# Altium PCB Arm.PcbDoc (part 1 of 2)
Units mil, origin at the board's own origin, x right, y up, seen from the top; angles counter-clockwise.
Board outline 3959.08 x 4177.68 mil, 4 copper layers (Top Layer, Ground, Power, Bottom Layer), stack 58.661 mil thick; 200 components, 119 nets, 620 pads, 0 vias.
Unrouted connection lines stored in the file: 405.
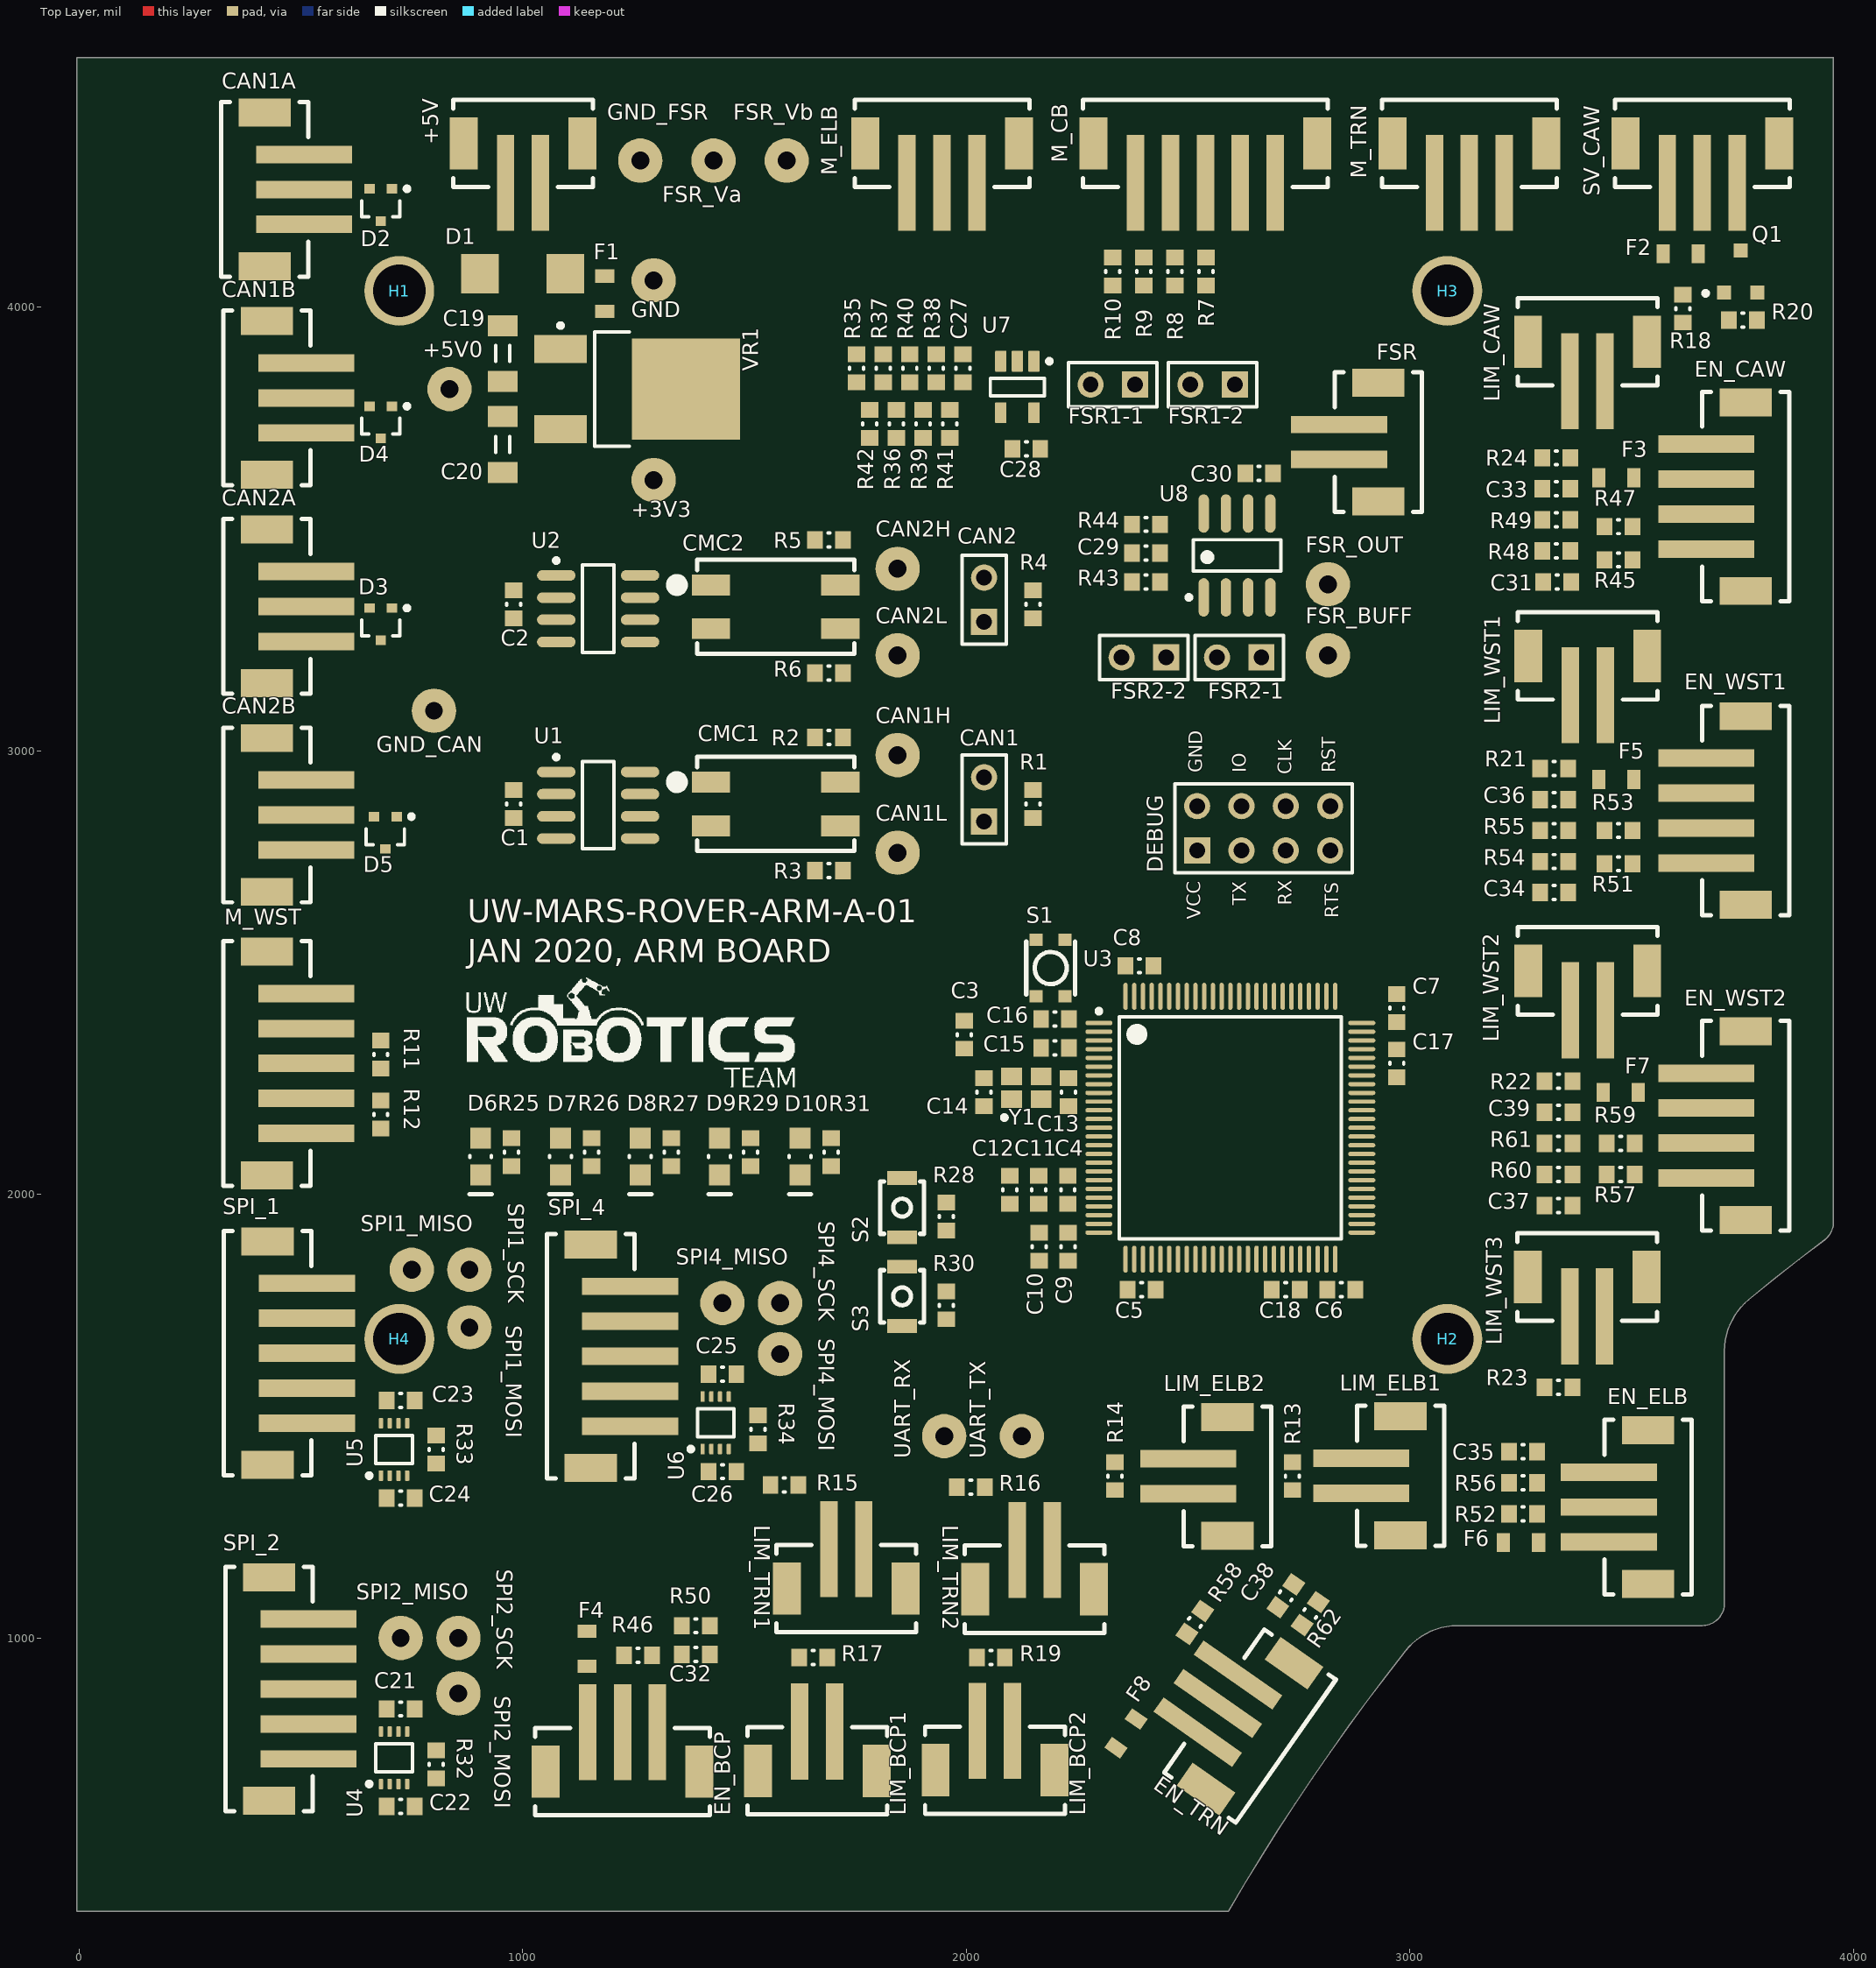
[diagram p0: Top Layer view]
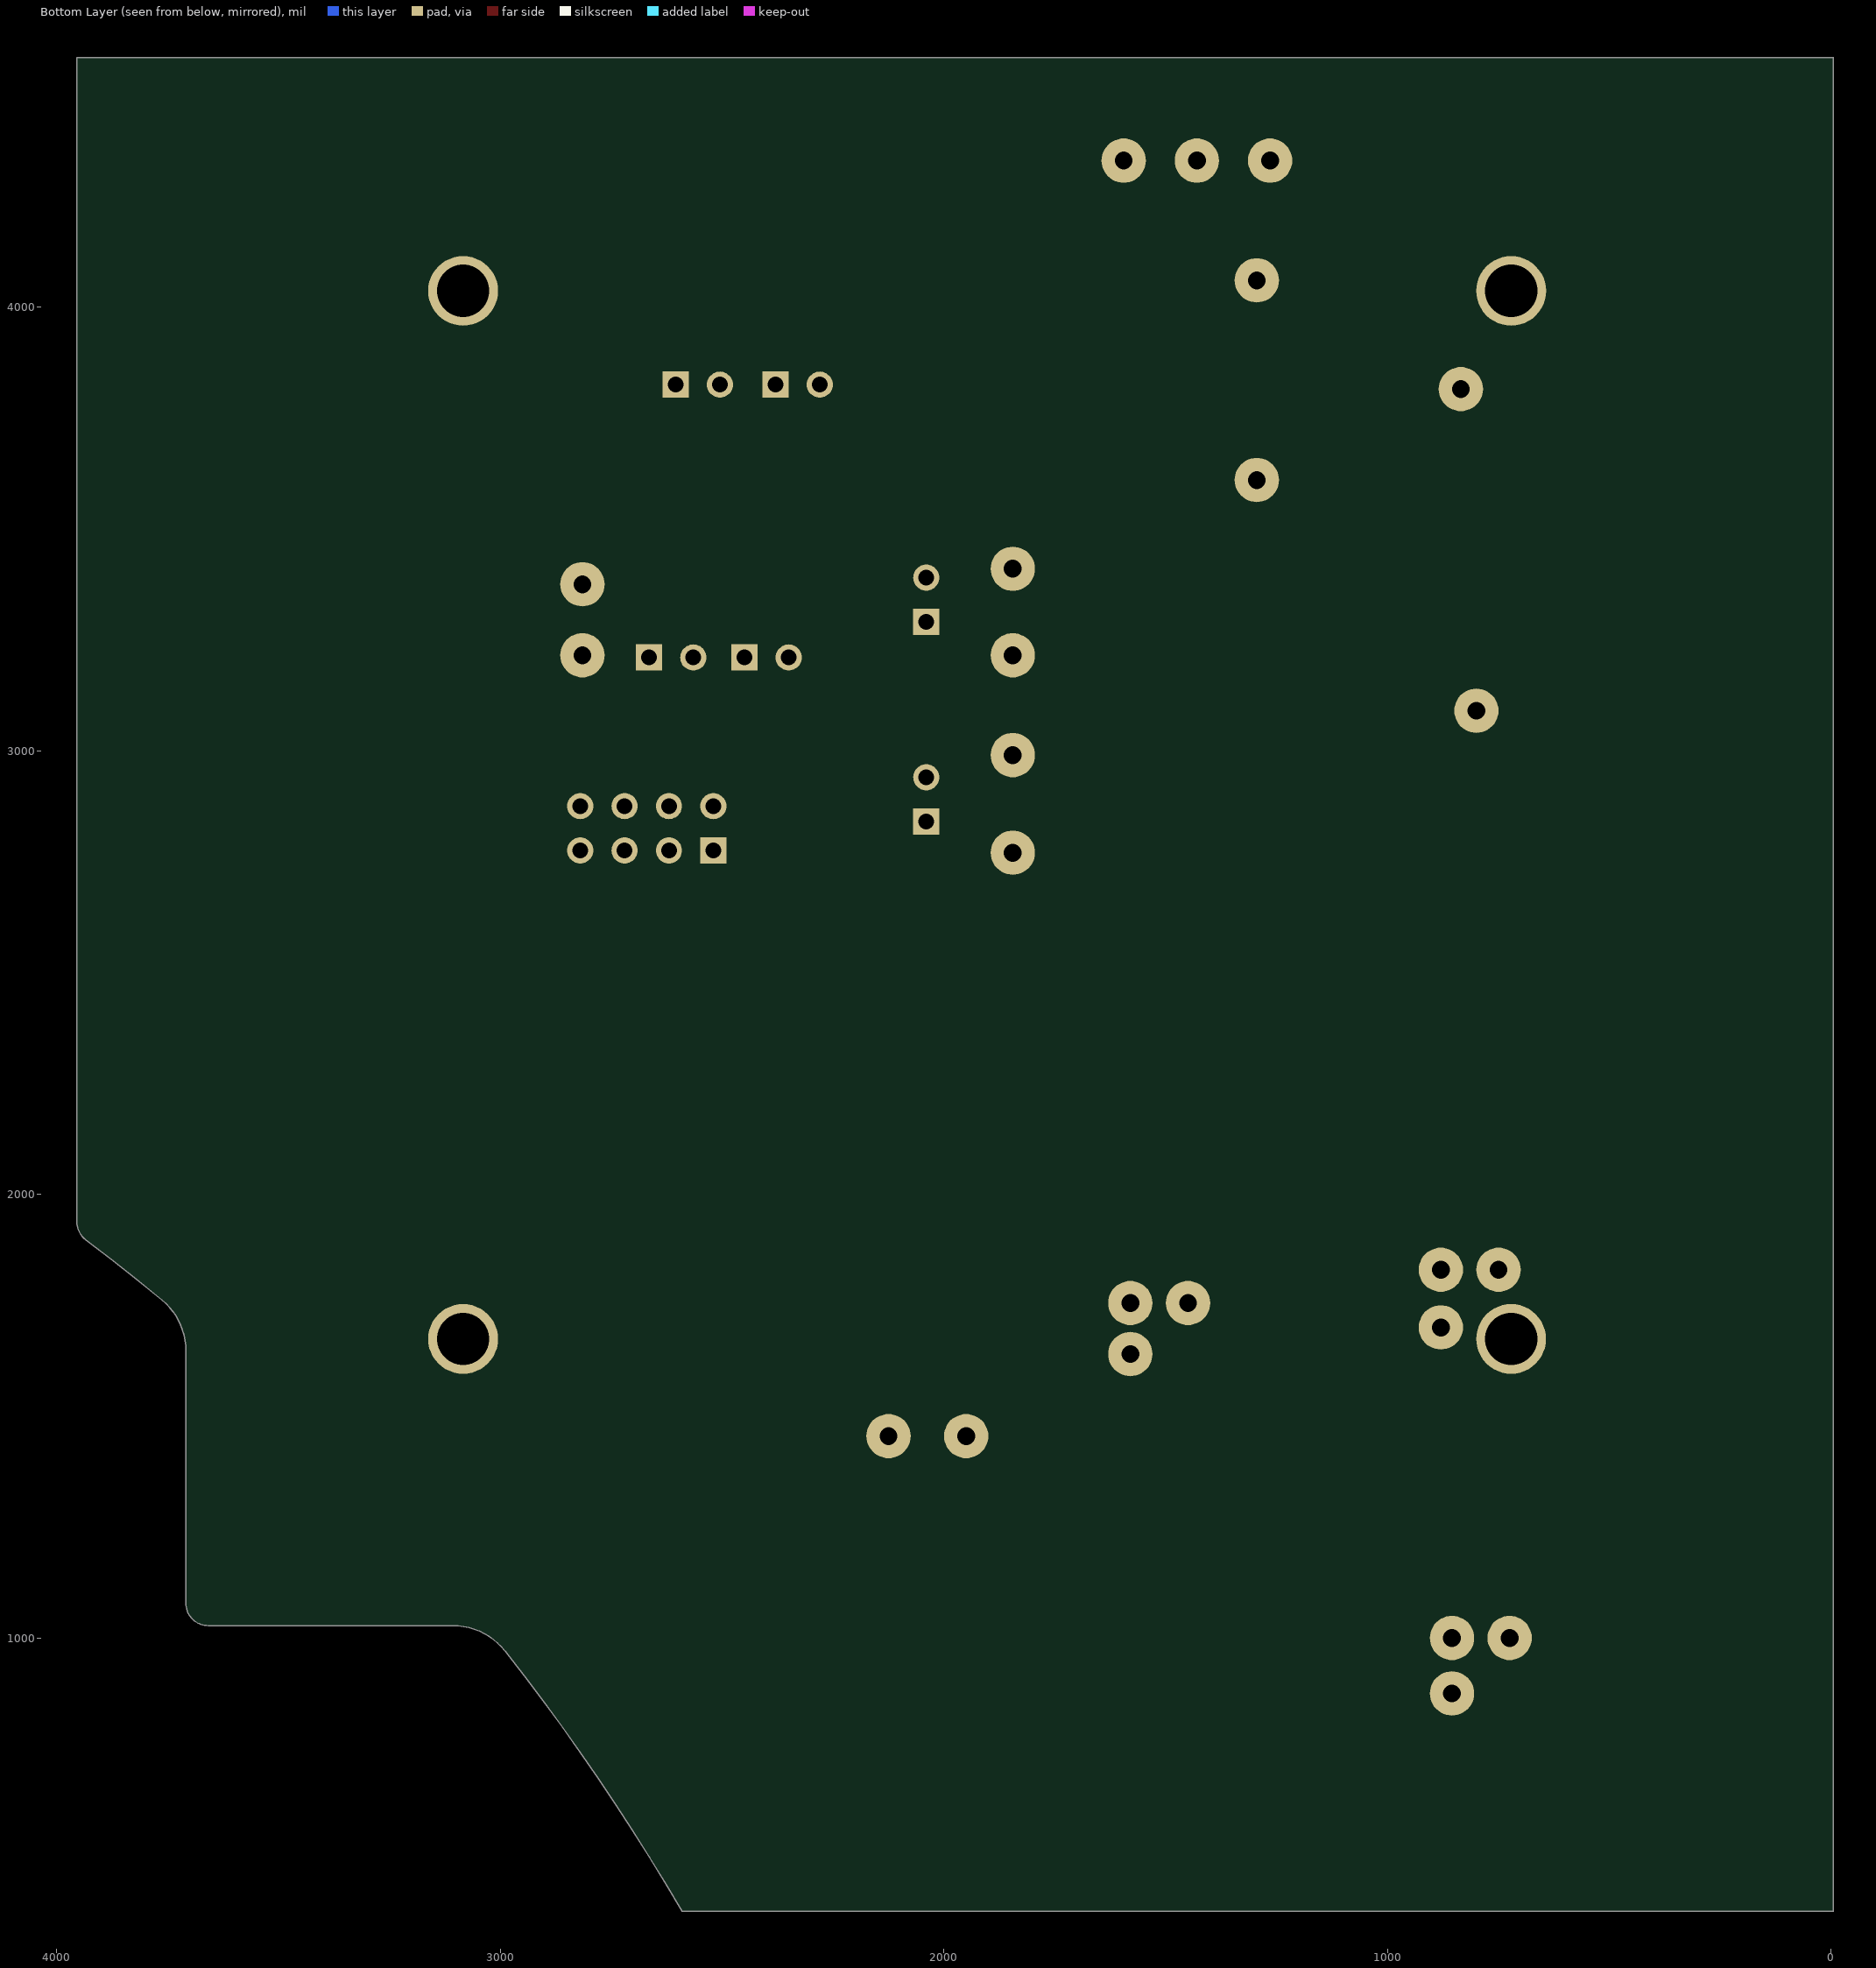
[diagram p1: Bottom Layer view, seen from below]
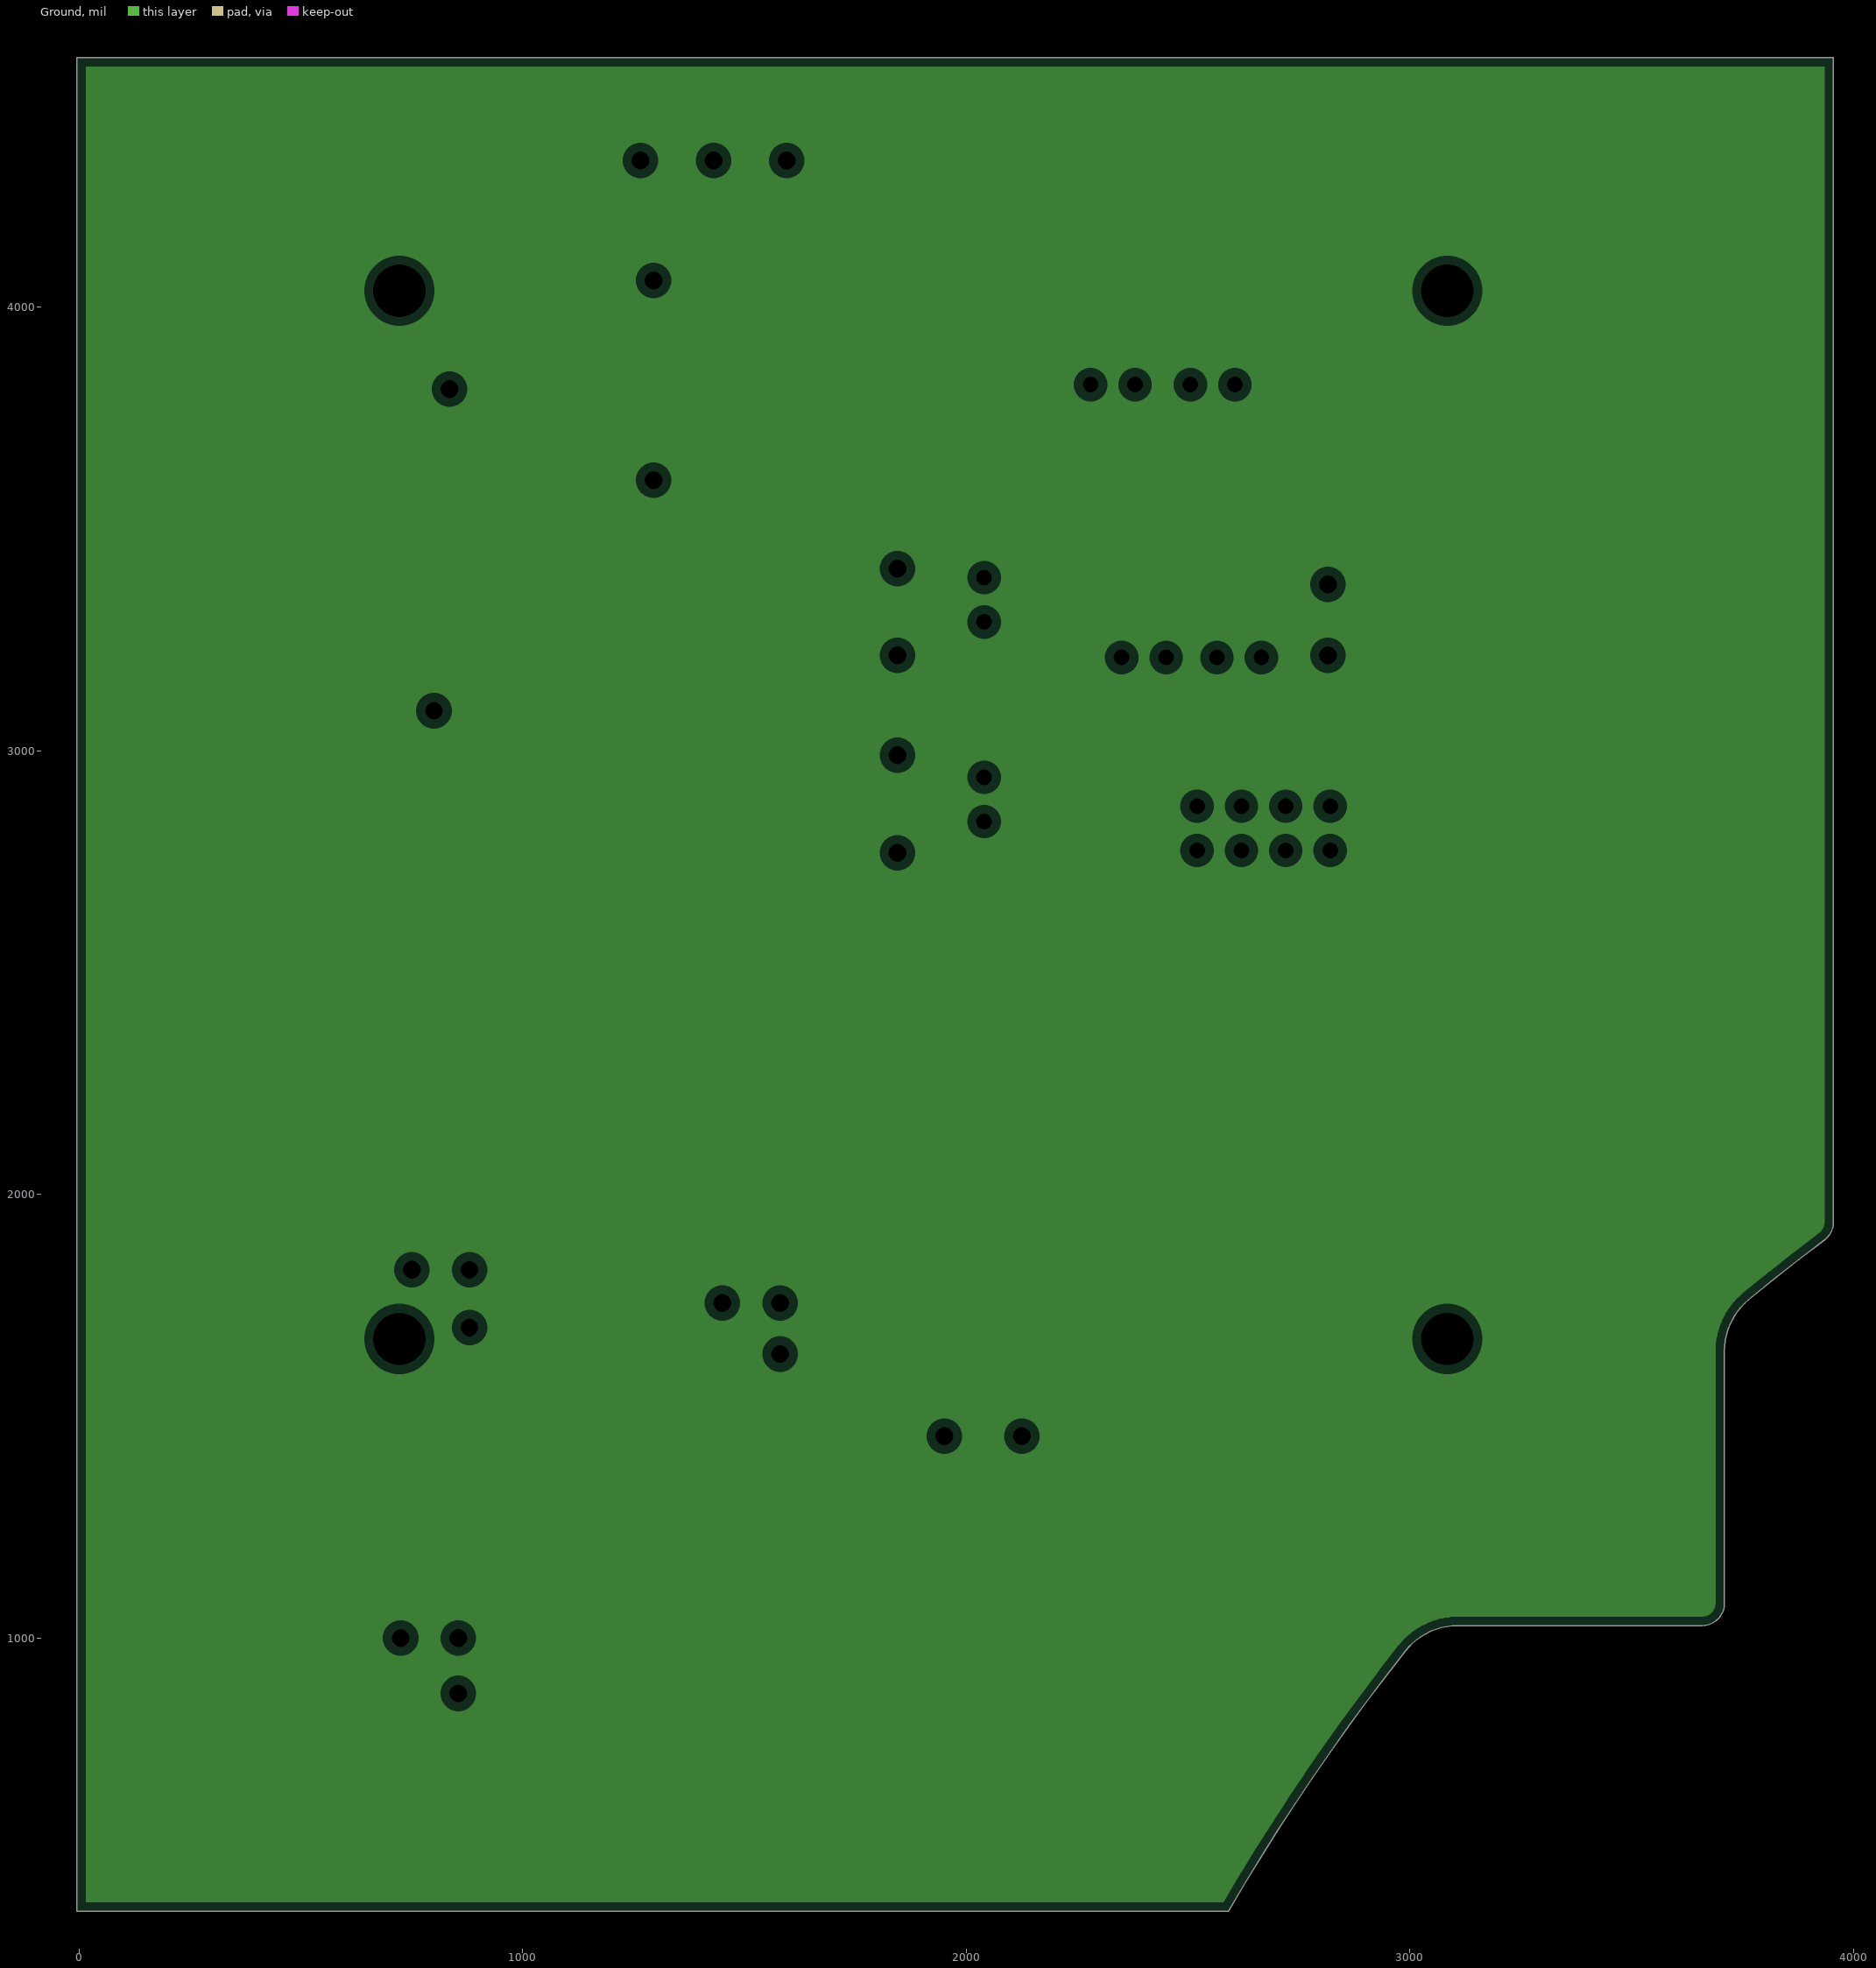
[diagram p2: Ground, clearances drawn from the general rule]
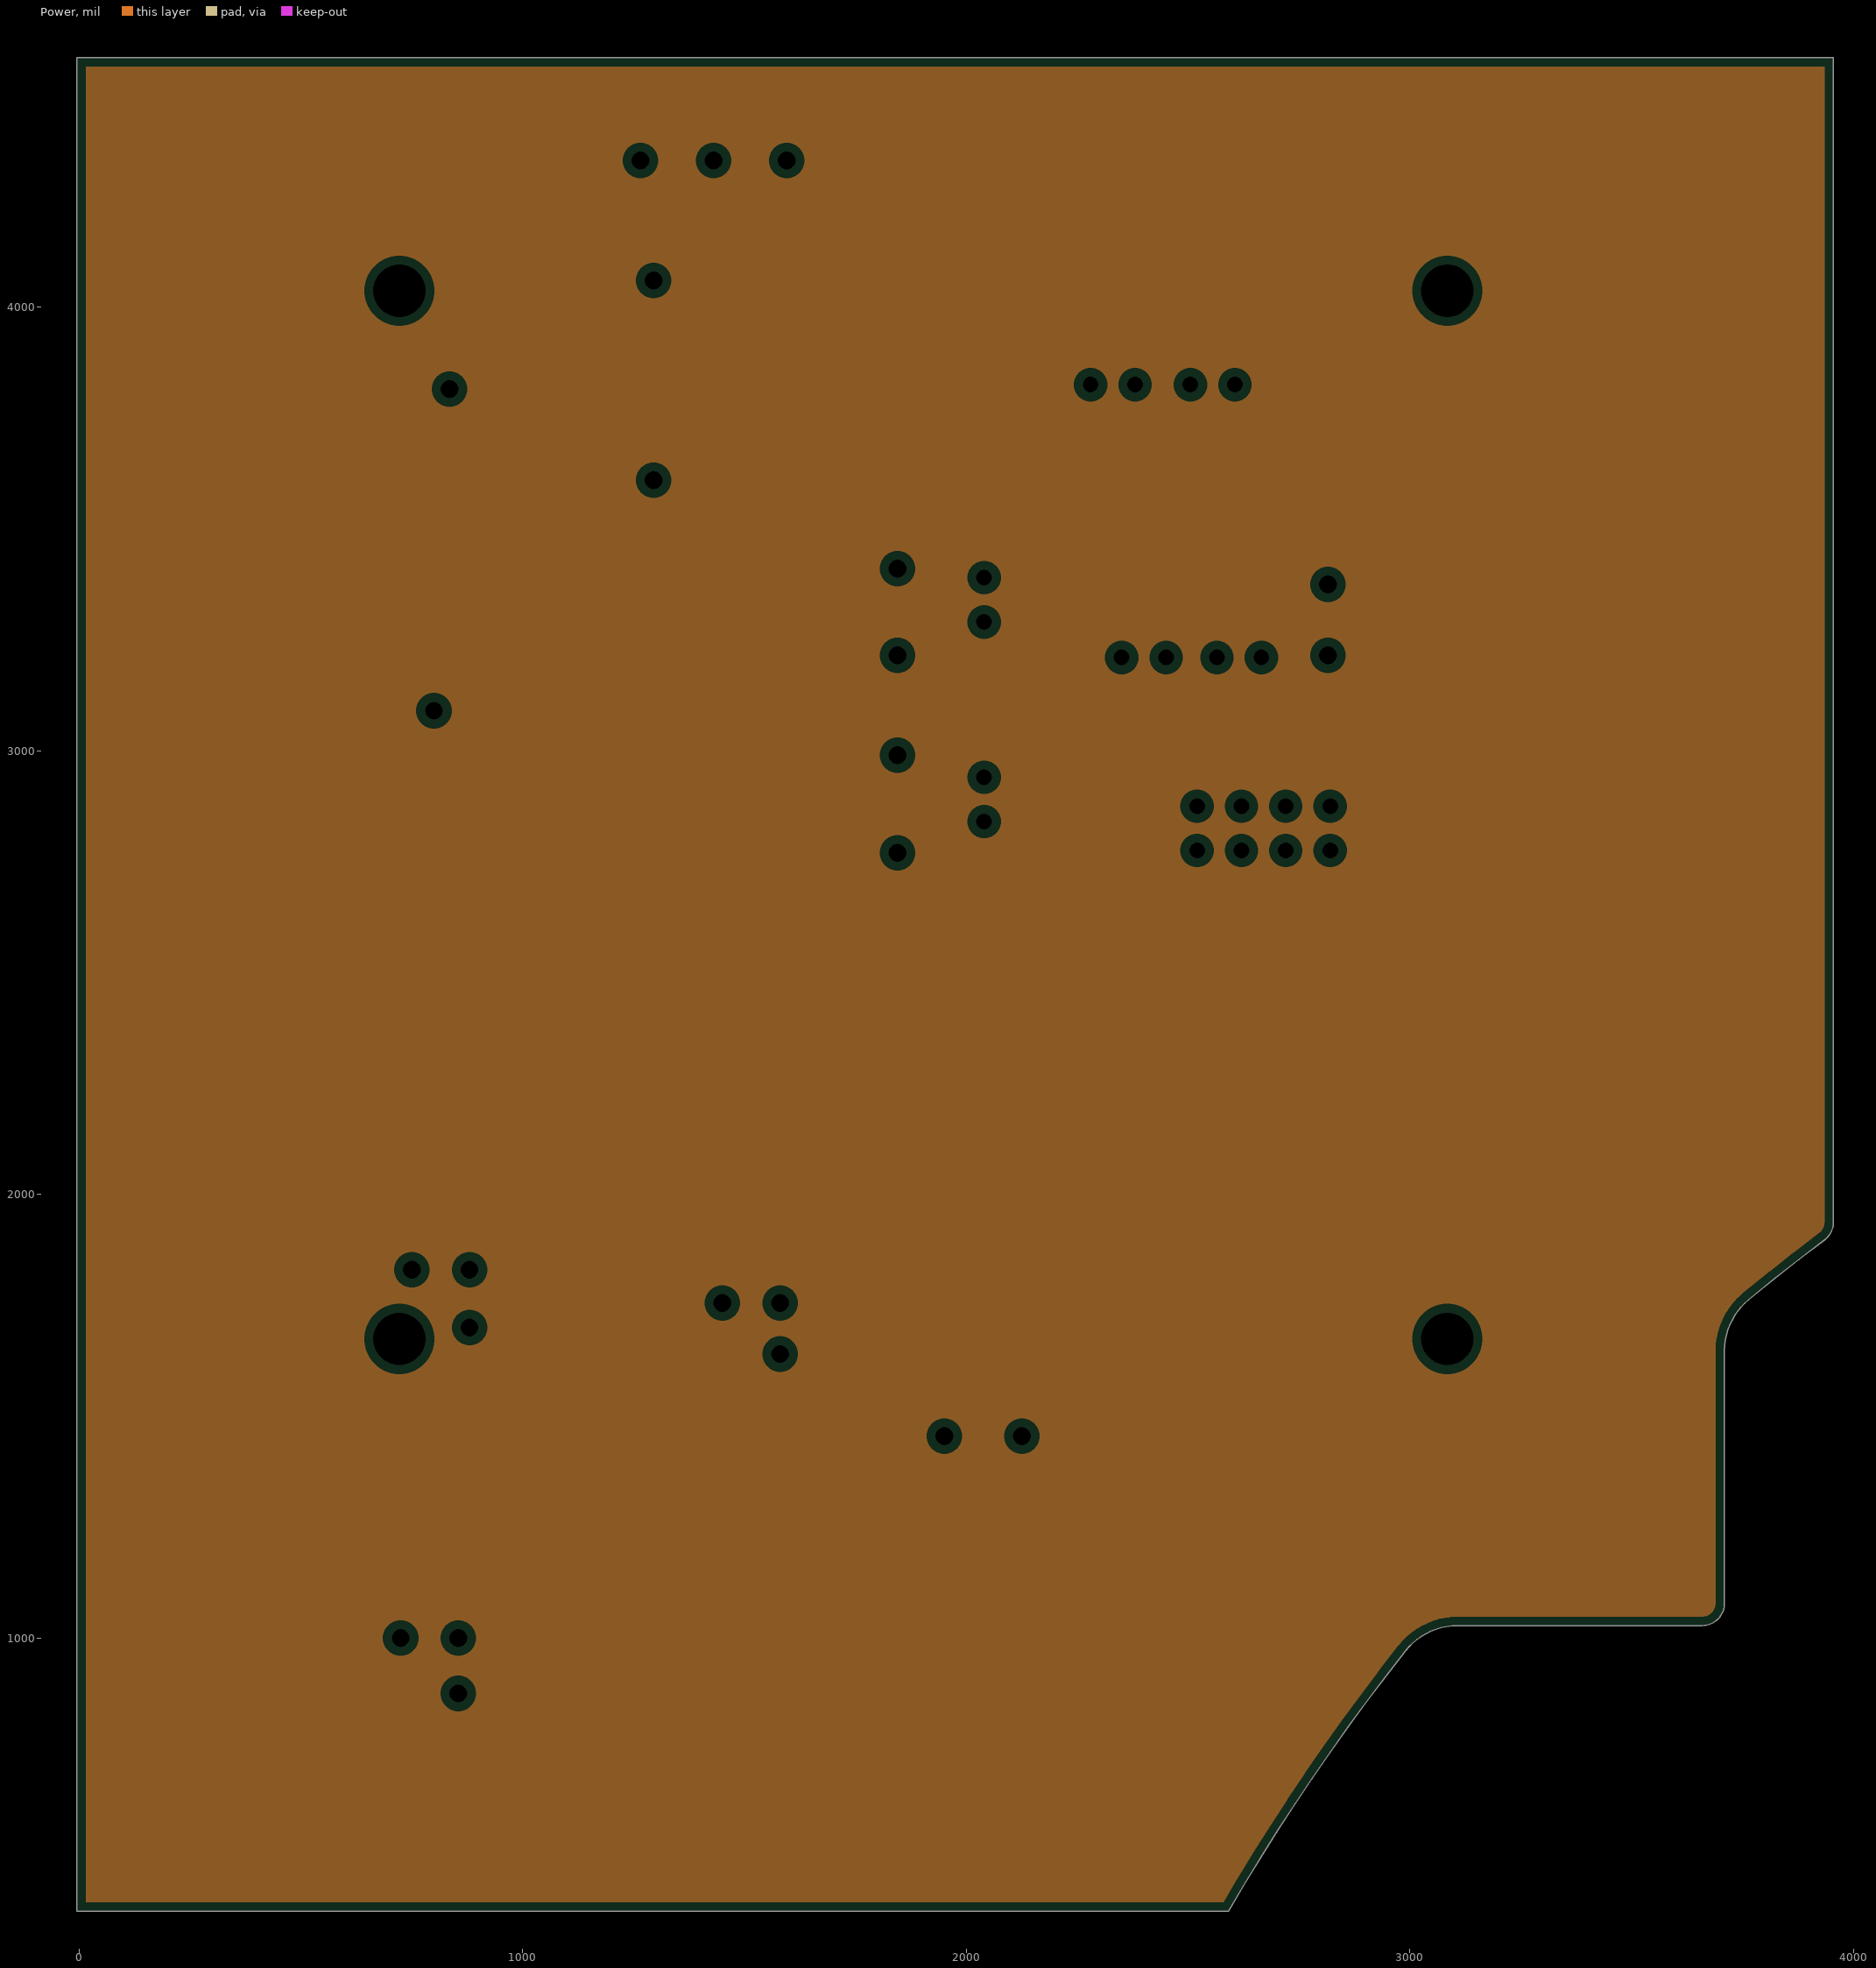
[diagram p3: Power, clearances drawn from the general rule]

## Layer stack, top to bottom
Top Solder: solder mask 0.7087, Solder Resist, Dk 3.5
Top Layer: signal copper 1.3779
Dielectric 2: prepreg 4.3307, PP-006, Dk 4.1
Ground: plane copper 1.3779
Dielectric 1: dielectric 44.4882, FR-4, Dk 4.8
Power: plane copper 1.3779
Dielectric 3: prepreg 4.3307, PP-006, Dk 4.1
Bottom Layer: signal copper 1.3779
Bottom Solder: solder mask 0.7087, Solder Resist, Dk 3.5

## Board outline
-4.5,384.24 2590.41,384.24 ccw(c2590.41,384.5) 2590.64,384.37 cw(c7037.86,-2212.17) 2989.5,970.69 ccw(c2989.29,970.85) 2989.5,970.69 cw(c3107.21,878.14) 3107.21,1027.88 3658.47,1027.88 ccw(c3658.47,1078.14) 3708.73,1078.14 3708.73,1646.78 cw(c3858.47,1646.78) 3763.25,1762.34 ccw(c3763.08,1762.55) 3763.26,1762.35 cw(c7037.86,-2212.17) 3934.35,1897.33 ccw(c3904.05,1937.44) 3954.32,1937.44 3954.32,4561.66 ccw(c3954.05,4561.66) 3954.05,4561.92 -4.5,4561.92 ccw(c-4.5,4561.66) -4.76,4561.66 -4.76,384.5 ccw(c-4.5,384.5)

## Design rules (kind name [scope] priority, off if disabled: settings)
Clearance [All] p1: gap=8 ignorepadtopadclearanceinfootprint=TRUE
DiffPairsRouting [All] p1: maxlimit=10 minlimit=10 mostfreqgap=10 toplayer_minwidth=15 toplayer_maxwidth=15 toplayer_prefwidth=15 bottomlayer_minwidth=15 bottomlayer_maxwidth=15 bottomlayer_prefwidth=15 maxuncoupledlength=500
PlaneClearance [All] p1: clearance=20
PlaneConnect [All] p1: planeconnectstyle=Relief reliefexpansion=20 reliefentries=4 reliefconductorwidth=10 reliefairgap=10
PolygonConnect [All] p1: connectstyle=Relief reliefconductorwidth=10 reliefentries=4 polygonreliefangle="90 Angle" airgapwidth=10
RoutingVias [All] p1: holewidth=28 width=50 viastyle="Through Hole" minholewidth=28 minwidth=50 maxholewidth=28 maxwidth=50
SolderMaskExpansion [All] p1: expansion=4
Width [All] p1: maxlimit=10 minlimit=10 preferedwidth=10
27 further rules are at their usual default settings.

## Classes and differential pairs
component class Support: D7 D8 D9 D10 H1 H2 H3 H4 R22 R27 S2 S3
component class "SPI Encoders": C21 C22 C23 C24 C25 C26 R27 R32 R34 SPI1_MISO SPI1_MOSI SPI1_SCK SPI2_MISO SPI2_MOSI SPI2_SCK SPI4_MISO SPI4_MOSI SPI4_SCK SPI_1 SPI_2 SPI_4 U4 U5 U6
component class POWER: +3V3 +5V0 C19 C20 D6 GND R19 VR1
component class MCU: C3 C4 C5 C6 C7 C8 C9 C10 C11 C12 C13 C14 C15 C16 C17 C18 S1 U3 UART_RX UART_TX Y1
component class FSR: C27 C28 C29 C30 FSR1-1 FSR1-2 FSR2-1 FSR2-2 FSR_BUFF FSR_OUT FSR_Va FSR_Vb GND_FSR R34 R35 R39 R42 U7 U8
component class Encoders: C31 C32 C33 C34 C35 C36 C37 C38 C39 EN_BCP EN_CAW EN_ELB EN_TRN EN_WST1 EN_WST2 F3 F4 F5 F6 F7 F8 R39 R42 R47 R49 R50 R51 R53 R54 R55 R58 R60 R61
component class Connectors: +5V CAN1A CAN1B CAN2A CAN2B D1 D2 D3 D4 D5 DEBUG F1 F2 FSR LIM_BCP1 LIM_BCP2 LIM_CAW LIM_ELB1 LIM_ELB2 LIM_TRN1 LIM_TRN2 LIM_WST1 LIM_WST2 LIM_WST3 M_CB M_ELB M_TRN M_WST Q1 R4 R9 R12 R17 R18 R19 R22 SV_CAW
component class CAN: C1 C2 CAN1 CAN1H CAN1L CAN2 CAN2H CAN2L CMC1 CMC2 GND_CAN R1 R4 U1 U2
differential pair CAN2: +CAN2_P -CAN2_N
differential pair CAN1: +CAN1_P -CAN1_N

## Components (designator, comment, footprint, x,y, rotation, side; value= is the part's Value field where it differs from the comment)
+3V3 "TESTPOINT_LOOP" TESTPOINT_LOOP 1295,3610 r90 top
+5V "CON_2M_SM4" JST-B2B-SM4-TB 1000.63,4467.01 r180 top
+5V0 "TESTPOINT_LOOP" TESTPOINT_LOOP 835,3815 r90 top
C1 "CAP_0.1uF_50V_0603" CAPC0603(1608)55_N 980,2880 r270 top value=0.1uF
C2 "CAP_0.1uF_50V_0603" CAPC0603(1608)55_N 980,3330 r270 top value=0.1uF
C3 "CAP_0.1uF_50V_0603" CAPC0603(1608)55_N 1995,2360 r90 top value=0.1uF
C4 "CAP_0.1uF_50V_0603" CAPC0603(1608)55_N 2228.7,2010 r270 top value=0.1uF
C5 "CAP_0.1uF_50V_0603" CAPC0603(1608)55_N 2395,1785 r180 top value=0.1uF
C6 "CAP_0.1uF_50V_0603" CAPC0603(1608)55_N 2845,1785 r180 top value=0.1uF
C7 "CAP_0.1uF_50V_0603" CAPC0603(1608)55_N 2970,2420 r90 top value=0.1uF
C8 "CAP_0.1uF_50V_0603" CAPC0603(1608)55_N 2390,2515 r0 top value=0.1uF
C9 "CAP_10nF_0603" CAPC0603(1608)55_N 2229.45,1881.97 r90 top value=10nF
C10 "CAP_0.1uF_50V_0603" CAPC0603(1608)55_N 2164.45,1881.97 r90 top value=0.1uF
C11 "CAP_10nF_0603" CAPC0603(1608)55_N 2162.95,2010 r90 top value=10nF
C12 "CAP_1uF_16V_0603" CAPC0603(1608)55_N 2097.95,2010 r270 top value=1uF
C13 "CAP_0.1uF_50V_0603" CAPC0603(1608)55_N 2230,2230 r270 top value=0.1uF
C14 "CAP_15pF_0603" CAPC0603(1608)55_N 2040,2230 r270 top value=15pF
C15 "CAP_15pF_0603" CAPC0603(1608)55_N 2200,2330 r0 top value=15pF
C16 "CAP_0.1uF_50V_0603" CAPC0603(1608)55_N 2200,2395 r0 top value=0.1uF
C17 "CAP_4.7uF_0603" CAPC0603(1608)55_N 2970,2295 r90 top value=4.7uF
C18 "CAP_4.7uF_0603" CAPC0603(1608)55_N 2720,1785 r0 top value=4.7uF
C19 "10uF" CAPC1206(3216) 955,3895 r90 top
C20 "10uF" CAPC1206(3216) 955,3690 r90 top
C21 "CAP_0.1uF_50V_0603" CAPC0603(1608)55_N 725,840 r180 top value=0.1uF
C22 "CAP_0.1uF_50V_0603" CAPC0603(1608)55_N 725,620 r180 top value=0.1uF
C23 "CAP_0.1uF_50V_0603" CAPC0603(1608)55_N 725,1535 r180 top value=0.1uF
C24 "CAP_0.1uF_50V_0603" CAPC0603(1608)55_N 725,1315 r180 top value=0.1uF
C25 "CAP_0.1uF_50V_0603" CAPC0603(1608)55_N 1450,1595 r180 top value=0.1uF
C26 "CAP_0.1uF_50V_0603" CAPC0603(1608)55_N 1450,1375 r180 top value=0.1uF
C27 "CAP_DNP_0603" CAPC0603(1608)55_N 1992.4,3861.61 r270 top value=DNP
C28 "CAP_0.1uF_50V_0603" CAPC0603(1608)55_N 2135,3680 r0 top value=0.1uF
C29 "CAP_DNP_0603" CAPC0603(1608)55_N 2405,3445 r0 top value=DNP
C30 "CAP_0.1uF_50V_0603" CAPC0603(1608)55_N 2660,3625 r180 top value=0.1uF
C31 "CAP_0.1uF_50V_0603" CAPC0603(1608)55_N 3331.5,3380 r0 top value=0.1uF
C32 "CAP_0.1uF_50V_0603" CAPC0603(1608)55_N 1390,962.58 r180 top value=0.1uF
C33 "CAP_0.1uF_50V_0603" CAPC0603(1608)55_N 3330,3590 r0 top value=0.1uF
C34 "CAP_0.1uF_50V_0603" CAPC0603(1608)55_N 3325,2680 r0 top value=0.1uF
C35 "CAP_0.1uF_50V_0603" CAPC0603(1608)55_N 3255,1420 r180 top value=0.1uF
C36 "CAP_0.1uF_50V_0603" CAPC0603(1608)55_N 3325,2890 r0 top value=0.1uF
C37 "CAP_0.1uF_50V_0603" CAPC0603(1608)55_N 3335,1975 r0 top value=0.1uF
C38 "CAP_0.1uF_50V_0603" CAPC0603(1608)55_N 2720,1095 r235 top value=0.1uF
C39 "CAP_0.1uF_50V_0603" CAPC0603(1608)55_N 3335,2185 r0 top value=0.1uF
CAN1 "JUMPER_2" HDR1X2 2040,2840 r90 top
CAN1A "CON_3M_SM4" JST-B3B-SM4-TB 320,4265 r270 top
CAN1B "CON_3M_SM4" JST-B3B-SM4-TB 325,3795 r270 top
CAN1H "TESTPOINT_LOOP" TESTPOINT_LOOP 1845,2990 r90 top
CAN1L "TESTPOINT_LOOP" TESTPOINT_LOOP 1845,2770 r90 top
CAN2 "JUMPER_2" HDR1X2 2040,3290 r90 top
CAN2A "CON_3M_SM4" JST-B3B-SM4-TB 325,3325 r270 top
CAN2B "CON_3M_SM4" JST-B3B-SM4-TB 325,2855 r270 top
CAN2H "TESTPOINT_LOOP" TESTPOINT_LOOP 1845,3410 r90 top
CAN2L "TESTPOINT_LOOP" TESTPOINT_LOOP 1845,3215 r90 top
CMC1 "CMC" DR331-513AE 1570,2880 r0 top
CMC2 "CMC" DR331-513AE 1570,3324.21 r0 top
D1 "TVS_DIODE_BIDIRECTIONAL" TVS_DIODE_BIDIRECTIONAL 1000,4075 r180 top
D2 "TVS_DIODE_CAN" NXP-SOT323-3 680,4230 r270 top
D3 "TVS_DIODE_CAN" NXP-SOT323-3 680,3285 r270 top
D4 "TVS_DIODE_CAN" NXP-SOT323-3 680,3740 r270 top
D5 "TVS_DIODE_CAN" NXP-SOT323-3 690,2815 r270 top
D6 "DIO_LED_G" LED_0805_LINE 905,2085 r270 top
D7 "DIO_LED_Y" LED_0805_LINE 1085,2085 r270 top
D8 "DIO_LED_G" LED_0805_LINE 1265,2085 r270 top
D9 "DIO_LED_G" LED_0805_LINE 1443.68,2085 r270 top
D10 "DIO_LED_G" LED_0805_LINE 1625,2085 r270 top
DEBUG "HEADER 4X2" HEADER_2X4 2520,2775 r0 top
EN_BCP "CON_3M_SM4" JST-B3B-SM4-TB 1225,600.57 r0 top
EN_CAW "CON_4M_SM4" JST-B4B-SM4-TB 3855,3572.6 r90 top
EN_ELB "CON_3M_SM4" JST-B3B-SM4-TB 3635,1295 r90 top
EN_TRN "CON_3M_SM4" JST-B3B-SM4-TB 2720,744.92 r55 top
EN_WST1 "CON_4M_SM4" JST-B4B-SM4-TB 3855,2865 r90 top
EN_WST2 "CON_4M_SM4" JST-B4B-SM4-TB 3855,2155 r90 top
F1 "FUSE_2A_0603" FUSE_0603 1185,4030 r270 top
F2 "FUSE_1.5A_0603" FUSE_0603 3610,4120 r180 top
F3 "FUSE_250mA_0603" FUSE_0603 3465,3615 r180 top
F4 "FUSE_250mA_0603" FUSE_0603 1145,975.65 r90 top
F5 "FUSE_250mA_0603" FUSE_0603 3465,2935 r180 top
F6 "FUSE_250mA_0603" FUSE_0603 3250,1215 r180 top
F7 "FUSE_250mA_0603" FUSE_0603 3475,2230 r180 top
F8 "FUSE_250mA_0603" FUSE_0603 2360,785 r235 top
FSR "CON_2M_SM4" JST-B2B-SM4-TB 3027.01,3695.63 r90 top
FSR1-1 "JUMPER_2" HDR1X2 2380,3825 r180 top
FSR1-2 "JUMPER_2" HDR1X2 2605,3825 r180 top
FSR2-1 "JUMPER_2" HDR1X2 2665,3210 r180 top
FSR2-2 "JUMPER_2" HDR1X2 2450,3210 r180 top
FSR_BUFF "TESTPOINT_LOOP" TESTPOINT_LOOP 2815,3215 r90 top
FSR_OUT "TESTPOINT_LOOP" TESTPOINT_LOOP 2815,3375 r90 top
FSR_Va "TESTPOINT_LOOP" TESTPOINT_LOOP 1430,4330 r90 top
FSR_Vb "TESTPOINT_LOOP" TESTPOINT_LOOP 1595,4330 r90 top
GND "TESTPOINT_LOOP" TESTPOINT_LOOP 1295,4060 r270 top
GND_CAN "TESTPOINT_LOOP" TESTPOINT_LOOP 800,3090 r90 top
GND_FSR "TESTPOINT_LOOP" TESTPOINT_LOOP 1265,4330 r180 top
H1 "MOUNTING_HOLES" MOUNTING_HOLE#1 721.64,4036.24 r0 top
H2 "MOUNTING_HOLES" MOUNTING_HOLE#2 3083.97,1714.04 r0 top
H3 "MOUNTING_HOLES" MOUNTING_HOLE#1 3083.97,4036.24 r0 top
H4 "MOUNTING_HOLES" MOUNTING_HOLE#1 721.76,1674.04 r0 top
LIM_BCP1 "CON_2M_SM4" JST-B2B-SM4-TB 1663.86,602.22 r0 top
LIM_BCP2 "CON_2M_SM4" JST-B2B-SM4-TB 2064.37,603.64 r0 top
LIM_CAW "CON_2M_SM4" JST-B2B-SM4-TB 3400,4020 r180 top
LIM_ELB1 "CON_2M_SM4" JST-B2B-SM4-TB 3077.01,1365.63 r90 top
LIM_ELB2 "CON_2M_SM4" JST-B2B-SM4-TB 2687.01,1364.37 r90 top
LIM_TRN1 "CON_2M_SM4" JST-B2B-SM4-TB 1729.37,1012.99 r0 top
LIM_TRN2 "CON_2M_SM4" JST-B2B-SM4-TB 2153.86,1011.57 r0 top
LIM_WST1 "CON_2M_SM4" JST-B2B-SM4-TB 3400.63,3312.01 r180 top
LIM_WST2 "CON_2M_SM4" JST-B2B-SM4-TB 3400.63,2602.01 r180 top
LIM_WST3 "CON_2M_SM4" JST-B2B-SM4-TB 3399.37,1912.01 r180 top
M_CB "CON_5M_SM4" JST-B5B-SM4-TB 2538.74,4467.01 r180 top
M_ELB "CON_3M_SM4" JST-B3B-SM4-TB 1945,4467.01 r180 top
M_TRN "CON_3M_SM4" JST-B3B-SM4-TB 3133.74,4467.01 r180 top
M_WST "CON_5M_SM4" JST-B5B-SM4-TB 325,2295 r270 top
Q1 "NMOS_20V_6A" NMOS_SOT23-3 3745,4080 r0 top
R1 "RES_120R_0603" RESC0603(1608)_N 2150,2880 r90 top value=120R
R2 "RES_0R_0603" RESC0603(1608)_N 1690,3030 r0 top value=0R
R3 "RES_0R_0603" RESC0603(1608)_N 1690,2730 r0 top value=0R
R4 "RES_120R_0603" RESC0603(1608)_N 2150,3330 r90 top value=120R
R5 "RES_0R_0603" RESC0603(1608)_N 1690,3475 r0 top value=0R
R6 "RES_0R_0603" RESC0603(1608)_N 1690,3175 r0 top value=0R
R7 "RES_10K_0603" RESC0603(1608)_N 2540,4080 r90 top value=10K
R8 "RES_10K_0603" RESC0603(1608)_N 2470,4080 r90 top value=10K
R9 "RES_10K_0603" RESC0603(1608)_N 2400,4080 r90 top value=10K
R10 "RES_10K_0603" RESC0603(1608)_N 2330,4080 r90 top value=10K
R11 "RES_10K_0603" RESC0603(1608)_N 680,2315 r90 top value=10K
R12 "RES_10K_0603" RESC0603(1608)_N 680,2180 r90 top value=10K
R13 "RES_10K_0603" RESC0603(1608)_N 2735,1365 r90 top value=10K
R14 "RES_10K_0603" RESC0603(1608)_N 2335,1365 r90 top value=10K
R15 "RES_10K_0603" RESC0603(1608)_N 1590,1345 r0 top value=10K
R16 "RES_10K_0603" RESC0603(1608)_N 2010,1340 r0 top value=10K
R17 "RES_10K_0603" RESC0603(1608)_N 1655,955.65 r0 top value=10K
R18 "RES_10K_0603" RESC0603(1608)_N 3615,3996.5 r90 top value=10K
R19 "RES_10K_0603" RESC0603(1608)_N 2055,955.65 r0 top value=10K
R20 "RES_10K_0603" RESC0603(1608)_N 3750,3970 r180 top value=10K
R21 "RES_10K_0603" RESC0603(1608)_N 3325,2960 r180 top value=10K
R22 "RES_10K_0603" RESC0603(1608)_N 3335,2255 r180 top value=10K
R23 "RES_10K_0603" RESC0603(1608)_N 3335,1565 r180 top value=10K
R24 "RES_10K_0603" RESC0603(1608)_N 3330,3660 r180 top value=10K
R25 "RES_100R_0603" RESC0603(1608)_N 975,2095 r270 top value=100R
R26 "RES_100R_0603" RESC0603(1608)_N 1155,2095 r90 top value=100R
R27 "RES_100R_0603" RESC0603(1608)_N 1335,2095 r90 top value=100R
R28 "RES_10K_0603" RESC0603(1608)_N 1955,1950 r270 top value=10K
R29 "RES_100R_0603" RESC0603(1608)_N 1513.68,2095 r90 top value=100R
R30 "RES_10K_0603" RESC0603(1608)_N 1955,1750 r90 top value=10K
R31 "RES_100R_0603" RESC0603(1608)_N 1695,2095 r90 top value=100R
R32 "RES_10K_0603" RESC0603(1608)_N 805,715 r90 top value=10K
R33 "RES_10K_0603" RESC0603(1608)_N 805,1425 r90 top value=10K
R34 "RES_10K_0603" RESC0603(1608)_N 1530,1470 r90 top value=10K
R35 "RES_825K_0603" RESC0603(1608)_N 1752.4,3861.61 r90 top value=825K
R36 "1.1K 1%" RESC0603(1608)_N 1842.4,3736.61 r90 top value=1K1
R37 "RES_165K_0603" RESC0603(1608)_N 1812.4,3861.61 r270 top value=165K
R38 "RES_DNP_0603" RESC0603(1608)_N 1932.4,3861.61 r270 top value=DNP
R39 "RES_165K_0603" RESC0603(1608)_N 1902.4,3736.61 r90 top value=165K
R40 "RES_2K2_0603" RESC0603(1608)_N 1872.4,3861.61 r90 top value=2K2
R41 "14.3K 1%" RESC0603(1608)_N 1962.4,3736.61 r270 top value=14K3
R42 "RES_825K_0603" RESC0603(1608)_N 1782.4,3736.61 r90 top value=825K
R43 "RES_DNP_0603" RESC0603(1608)_N 2405,3380 r0 top value=DNP
R44 "RES_1K_0603" RESC0603(1608)_N 2405,3510 r0 top value=1K
R45 "RES_3K3_0603" RESC0603(1608)_N 3470,3430 r0 top value=3K3
R46 "RES_3K3_0603" RESC0603(1608)_N 1260,960.65 r180 top value=3K3
R47 "RES_3K3_0603" RESC0603(1608)_N 3470,3505 r0 top value=3K3
R48 "RES_2K2_0603" RESC0603(1608)_N 3330,3450 r0 top value=2K2
R49 "RES_2K2_0603" RESC0603(1608)_N 3330,3520 r0 top value=2K2
R50 "RES_2K2_0603" RESC0603(1608)_N 1390,1027.58 r180 top value=2K2
R51 "RES_3K3_0603" RESC0603(1608)_N 3470,2745 r0 top value=3K3
R52 "RES_3K3_0603" RESC0603(1608)_N 3255,1280 r0 top value=3K3
R53 "RES_3K3_0603" RESC0603(1608)_N 3470,2820 r0 top value=3K3
R54 "RES_2K2_0603" RESC0603(1608)_N 3325,2750 r0 top value=2K2
R55 "RES_2K2_0603" RESC0603(1608)_N 3325,2820 r0 top value=2K2
R56 "RES_2K2_0603" RESC0603(1608)_N 3255,1350 r180 top value=2K2
R57 "RES_3K3_0603" RESC0603(1608)_N 3475,2045 r0 top value=3K3
R58 "RES_3K3_0603" RESC0603(1608)_N 2515,1035 r235 top value=3K3
R59 "RES_3K3_0603" RESC0603(1608)_N 3475,2115 r0 top value=3K3
R60 "RES_2K2_0603" RESC0603(1608)_N 3335,2045 r0 top value=2K2
R61 "RES_2K2_0603" RESC0603(1608)_N 3335,2115 r0 top value=2K2
R62 "RES_2K2_0603" RESC0603(1608)_N 2775,1055 r235 top value=2K2
S1 "SW_PWR" PTS830GM140 2190,2510 r90 top
S2 "SW_TACTILE" B3U-1100P 1855,1970 r270 top
S3 "SW_TACTILE" B3U-1100P 1855,1770 r90 top
SPI1_MISO "TESTPOINT_LOOP" TESTPOINT_LOOP 750,1830 r90 top
SPI1_MOSI "TESTPOINT_LOOP" TESTPOINT_LOOP 880,1700 r90 top
SPI1_SCK "TESTPOINT_LOOP" TESTPOINT_LOOP 880,1830 r270 top
SPI2_MISO "TESTPOINT_LOOP" TESTPOINT_LOOP 725,1000 r90 top
SPI2_MOSI "TESTPOINT_LOOP" TESTPOINT_LOOP 855,875 r90 top
SPI2_SCK "TESTPOINT_LOOP" TESTPOINT_LOOP 855,1000 r90 top
SPI4_MISO "TESTPOINT_LOOP" TESTPOINT_LOOP 1450,1755 r90 top
SPI4_MOSI "TESTPOINT_LOOP" TESTPOINT_LOOP 1580,1640 r90 top
SPI4_SCK "TESTPOINT_LOOP" TESTPOINT_LOOP 1580,1755 r90 top
SPI_1 "CON_5M_SM4" JST-B5B-SM4-TB 326.57,1641.97 r270 top
SPI_2 "CON_5M_SM4" JST-B5B-SM4-TB 330,885 r270 top
SPI_4 "CON_5M_SM4" JST-B5B-SM4-TB 1055,1635 r270 top
SV_CAW "CON_3M_SM4" JST-B3B-SM4-TB 3658.74,4467.01 r180 top
U1 "IC TXRX CAN" LT-S8_N 1170,2877.03 r0 top
U2 "IC TXRX CAN" LT-S8_N 1170,3320 r0 top
U3 "STM32F446VET7" STM-LQFP100_L 2595,2150 r0 top
U4 "SN74LVC2T45DCURG4" DCU0008A_L 710,730 r90 top
U5 "SN74LVC2T45DCURG4" DCU0008A_L 710,1425 r90 top
U6 "SN74LVC2T45DCURG4" DCU0008A_L 1435,1485 r90 top
U7 "OPA313IDBVR" DBV0005A_M 2115,3819.68 r270 top
U8 "CA3140AMZ" CA3140AMZ 2610,3440 r90 top
UART_RX "TESTPOINT_LOOP" TESTPOINT_LOOP 1950.01,1454.99 r90 top
UART_TX "TESTPOINT_LOOP" TESTPOINT_LOOP 2125.01,1454.99 r90 top
VR1 "5V0_3V3_LDO" VOLTAGE_REGULATOR 1195,3815 r270 top
Y1 "CRYSTAL_32MHZ" AVX-CX2520DB32000D0GEJZ1-4_V 2135,2240 r90 top

## Footprints (in the part's own frame and the unit in brackets; to place one, negate y for a bottom-side part, rotate by r counter-clockwise, add the part's x,y. Pads: shape width x height; smd on the part's side, far side on the other; paste and mask are expansions set on the pad)
AVX-CX2520DB32000D0GEJZ1-4_V [mm] "Hand Drawn, 4-Leads,Body 2.5x2mm"
  rect 1x1.2 smd: 1(-0.65,0.85) 2(-0.65,-0.85) 3(0.65,-0.85) 4(0.65,0.85)
  silkscreen extent -1.82,1.13 -1.58,1.38, body extent -1,-1.25 1,1.25, height 0.55
B3U-1100P [mm] "TACTILE SWITCH GREY"
  rect 0.8x1.7 smd: 1(-1.7,0) 2(1.7,0)
  silkscreen extent -1.5,-1.25 1.5,1.25, body extent -2,-1.25 2,1.25, height 1.6
CA3140AMZ [mm]
  oval 2.2x0.6 smd: 1(-2.4,1.905) 2(-2.4,0.635) 3(-2.4,-0.635) 4(-2.4,-1.905) 5(2.4,-1.905) 6(2.4,-0.635) 7(2.4,0.635) 8(2.4,1.905)
  silkscreen extent -2.52,-2.5 0.9,2.88, body extent -2,-2.5 2,2.5, height 1.75
CAPC0603(1608)55_N [mm] "Chip Capacitor, Body 1.6x0.8mm, Height 0.55mm, IPC Medium Density"
  rect 0.9x1 smd: 1(-0.8,0) 2(0.8,0)
  silkscreen extent -0.05,-0.4 0.05,0.4, body extent -0.87,-0.48 0.88,0.47, height 0.55
CAPC1206(3216) [mm] "Chip Capacitor, Body 3.2x1.6mm, Height 0.55mm, IPC Medium Density"
  rect 1.2x1.7 smd: 1(-1.6,0) 2(1.6,0)
  silkscreen extent -0.45,-0.4 0.45,0.4, body extent -1.6,-0.85 1.6,0.85, height 1.75
DBV0005A_M [mm] "SOT23, 5-Leads, Body 3.05x1.75mm, Pitch 0.95mm, IPC Low Density"
  rrect15% 1.2x0.65 smd: 1(-1.475,0.95) 2(-1.475,0) 3(-1.475,-0.95) 4(1.475,-0.95) 5(1.475,0.95)
  silkscreen extent -1.6,-1.55 0.5,1.95, body extent -1.42,-1.46 1.42,1.46, height 1.08
DCU0008A_L [mm] "SOP, 8-Leads, Body 2.4x2.1mm, Pitch 0.5mm, IPC High Density"
  rrect40% 0.6x0.25 smd: 1(-1.5,0.75) 2(-1.5,0.25) 3(-1.5,-0.25) 4(-1.5,-0.75) 5(1.5,-0.75) 6(1.5,-0.25) 7(1.5,0.25) 8(1.5,0.75)
  silkscreen extent -1.62,-1.05 0.8,1.55, body extent -1.56,-1 1.56,1, height 0.9
DR331-513AE [mm] "CMC"
  rect 2.2x1.2 smd: 1(-3.7,1.25) 2(-3.7,-1.25) 3(3.7,-1.25) 4(3.7,1.25)
  silkscreen extent -5.95,-2.7 4.5,2.7, body extent -4.5,-2.7 4.5,2.7, height 5.01
FUSE_0603 [mm] "Chip Fuse, Body 1.6x0.81mm"
  rect 0.762x1.09 smd: 1(-1.005,0) 2(1.005,0)
  body extent -0.8,-0.38 0.8,0.38, height 0.75
HDR1X2 [mm] "Connector; Header; 2 Position"
  rect 1.5x1.5 hole 0.9: 1(0,0)
  round 1.5 hole 0.9: 2(2.54,0)
  silkscreen extent -1.27,-1.27 3.81,1.27, body extent -1.27,-1.27 3.81,1.27, height 6.35
HEADER_2X4 [mm]
  rect 1.5x1.5 hole 0.9: 1(0,0)
  round 1.5 hole 0.9: 2(2.54,0) 3(5.08,0) 4(7.62,0) 5(0,2.54) 6(2.54,2.54) 7(5.08,2.54) 8(7.62,2.54)
  silkscreen extent -1.27,-1.27 8.89,3.81, body extent -1.36,-1.32 8.8,3.67, height 8.54
JST-B2B-SM4-TB [mm]
  rect 1x5.5 smd: 1(-1,4.75) 2(1,4.75)
  rect 1.6x3 smd: 3(-3.4,2.5) 4(3.4,2.5)
  silkscreen extent -4,0 4,5, body extent -3.97,0 3.97,7, height 6.6
JST-B3B-SM4-TB [mm]
  rect 1x5.5 smd: 1(-2,4.75) 2(0,4.75) 3(2,4.75)
  rect 1.6x3 smd: 4(-4.4,2.5) 5(4.4,2.5)
  silkscreen extent -5,0 5,5, body extent -4.97,0 4.97,7, height 6.6
JST-B4B-SM4-TB [mm]
  rect 1x5.5 smd: 1(-3,4.75) 2(-1,4.75) 3(1,4.75) 4(3,4.75)
  rect 1.6x3 smd: 5(-5.4,2.5) 6(5.4,2.5)
  silkscreen extent -6,0 6,5, body extent -5.98,0 5.98,7, height 6.6
JST-B5B-SM4-TB [mm]
  rect 1x5.5 smd: 1(-4,4.75) 2(-2,4.75) 3(0,4.75) 4(2,4.75) 5(4,4.75)
  rect 1.6x3 smd: 6(-6.4,2.5) 7(6.4,2.5)
  silkscreen extent -7,0 7,5, body extent -6.98,0 6.98,7, height 6.6
LED_0805_LINE [mm] "SMD, 2-Leads, Body 2x1.25mm"
  rect 1.2x1.2 smd: 1(-1.05,0) 2(1.05,0)
  silkscreen extent -0.05,-0.63 2.16,0.64, body extent -1,-0.63 1,0.63, height 0.8
LT-S8_N [mm] "SOP, 8-Leads, Body 4.9x3.9mm, Pitch 1.27mm, IPC Medium Density"
  oval 2.2x0.6 smd: 1(-2.4,1.905) 2(-2.4,0.635) 3(-2.4,-0.635) 4(-2.4,-1.905) 5(2.4,-1.905) 6(2.4,-0.635) 7(2.4,0.635) 8(2.4,1.905)
  silkscreen extent -2.52,-2.5 0.9,2.88, body extent -2,-2.5 2,2.5, height 1.76
MOUNTING_HOLE#1 [mm]
  round 4 hole 3 unplated mask+0.102: 0(0,0)
MOUNTING_HOLE#2 [mm]
  round 4 hole 3 unplated mask+0.102: 0(0,-1.016)
NMOS_SOT23-3 [mm] "SOT23, 3 pins, Body 2.90mm x 2.80mm"
  rect 0.8x0.8 smd: 1(-0.95,-1.2) 2(0.95,-1.2) 3(0,1.2)
  silkscreen extent -2.12,-1.37 -1.88,-1.13, body extent -1.46,-1.25 1.46,1.23, height 1
NXP-SOT323-3 [mm] "SOT23, 3-Leads, Body 2.2x1.35mm, Pitch 0.65mm"
  rect 0.55x0.6 smd paste-1: 1(-0.925,0.65) 2(-0.925,-0.65) 3(0.925,0)
  silkscreen extent -1.05,-1.1 0.67,1.63, body extent -1.15,-1.1 1.15,1.1, height 1.1
PTS830GM140 [mm] "PWR TACTILE SWITCH (RED)"
  rect 0.7x0.75 smd: 1(-1.625,0.825) 2(1.625,0.825) 3(-1.625,-0.825) 4(1.625,-0.825)
  silkscreen extent -1.53,-1.4 1.53,1.4, body extent -1.75,-1.3 1.75,1.3, height 1.35
RESC0603(1608)_N [mm] "Chip Resistor, Body 1.6x0.8mm, IPC Medium Density"
  rect 0.9x1 smd: 1(-0.8,0) 2(0.8,0)
  silkscreen extent -0.05,-0.4 0.05,0.4, body extent -0.85,-0.47 0.85,0.47, height 0.6
STM-LQFP100_L [mm] "Thin QFP, 100-Leads, Body 14x14mm, Pitch 0.5mm, IPC High Density"
  oval 1.55x0.25 smd: 1(-7.525,6) 2(-7.525,5.5) 3(-7.525,5) 4(-7.525,4.5) 5(-7.525,4) 6(-7.525,3.5) 7(-7.525,3) 8(-7.525,2.5) 9(-7.525,2) 10(-7.525,1.5) 11(-7.525,1) 12(-7.525,0.5) 13(-7.525,0) 14(-7.525,-0.5) 15(-7.525,-1) 16(-7.525,-1.5) 17(-7.525,-2) 18(-7.525,-2.5) 19(-7.525,-3) 20(-7.525,-3.5) 21(-7.525,-4) 22(-7.525,-4.5) 23(-7.525,-5) 24(-7.525,-5.5) 25(-7.525,-6) 51(7.525,-6) 52(7.525,-5.5) 53(7.525,-5) 54(7.525,-4.5) 55(7.525,-4) 56(7.525,-3.5) 57(7.525,-3) 58(7.525,-2.5) 59(7.525,-2) 60(7.525,-1.5) 61(7.525,-1) 62(7.525,-0.5) 63(7.525,0) 64(7.525,0.5) 65(7.525,1) 66(7.525,1.5) 67(7.525,2) 68(7.525,2.5) 69(7.525,3) 70(7.525,3.5) 71(7.525,4) 72(7.525,4.5) 73(7.525,5) 74(7.525,5.5) 75(7.525,6)
  oval 0.25x1.55 smd: 26(-6,-7.525) 27(-5.5,-7.525) 28(-5,-7.525) 29(-4.5,-7.525) 30(-4,-7.525) 31(-3.5,-7.525) 32(-3,-7.525) 33(-2.5,-7.525) 34(-2,-7.525) 35(-1.5,-7.525) 36(-1,-7.525) 37(-0.5,-7.525) 38(0,-7.525) 39(0.5,-7.525) 40(1,-7.525) 41(1.5,-7.525) 42(2,-7.525) 43(2.5,-7.525) 44(3,-7.525) 45(3.5,-7.525) 46(4,-7.525) 47(4.5,-7.525) 48(5,-7.525) 49(5.5,-7.525) 50(6,-7.525) 76(6,7.525) 77(5.5,7.525) 78(5,7.525) 79(4.5,7.525) 80(4,7.525) 81(3.5,7.525) 82(3,7.525) 83(2.5,7.525) 84(2,7.525) 85(1.5,7.525) 86(1,7.525) 87(0.5,7.525) 88(0,7.525) 89(-0.5,7.525) 90(-1,7.525) 91(-1.5,7.525) 92(-2,7.525) 93(-2.5,7.525) 94(-3,7.525) 95(-3.5,7.525) 96(-4,7.525) 97(-4.5,7.525) 98(-5,7.525) 99(-5.5,7.525) 100(-6,7.525)
  silkscreen extent -7.65,-6.35 6.35,6.8, body extent -7,-7 7,7, height 1.6
TESTPOINT_LOOP [mm]
  round 2.54 hole 1.02: 1(0,0)
  body extent -1.27,-1.27 1.27,1.27, height 4.57
TVS_DIODE_BIDIRECTIONAL [mm]
  rect 2.16x2.26 smd: 1(-2.45,0) 2(2.45,0)
  body extent -2.7,-1.8 2.7,1.8, height 2.27
VOLTAGE_REGULATOR [mm] "DPAK, 3-Leads, Body 6.095x6.54mm, Pitch 4.57mm"
  rect 1.6x3 smd: 1(-2.285,-2.79) 3(2.285,-2.79)
  rect 5.8x6.2 smd: 2(0,4.39)
  silkscreen extent -3.76,-2.91 3.27,1.14, body extent -3.27,-0.84 3.27,5.25, height 2.38

## Part data
+3V3 +5V0 CAN1H CAN1L CAN2H CAN2L FSR_BUFF FSR_OUT FSR_Va FSR_Vb GND GND_CAN GND_FSR SPI1_MISO SPI1_MOSI SPI1_SCK SPI2_MISO SPI2_MOSI SPI2_SCK SPI4_MISO SPI4_MOSI SPI4_SCK UART_RX UART_TX: "Loop testpoint through-hole pad", Manufacturer="Keystone Electronics", Manufacturer Part Number 1=5002, Supplier Part Number 1=36-5002-ND, Supplier 1=Digi-Key
+5V FSR LIM_BCP1 LIM_BCP2 LIM_CAW LIM_ELB1 LIM_ELB2 LIM_TRN1 LIM_TRN2 LIM_WST1 LIM_WST2 LIM_WST3: Manufacturer=JST, Manufacturer Part Number=B2B-PH-SM4-TB(LF)(SN), Max Current Rating=2A, Max Voltage Rating=100V, Supplier Part Number 1=455-1734-1-ND, ComponentLink1Description=https://datasheet.ciiva.com/11748/0900766b80ddea81-11748001.pdf?src-supplier=RSComponents, ComponentLink1URL=https://datasheet.ciiva.com/11748/0900766b80ddea81-11748001.pdf?src-supplier=RSComponents, ComponentLink2Description=https://datasheet.ciiva.com/16216/b2b-ph-sm4-tblfsn-16216102.pdf?src-supplier=Future+Electronics, ComponentLink2URL=https://datasheet.ciiva.com/16216/b2b-ph-sm4-tblfsn-16216102.pdf?src-supplier=Future+Electronics, ComponentLink3Description=https://datasheet.ciiva.com/8052/80567-8052023.pdf?src-supplier=Element14, ComponentLink3URL=https://datasheet.ciiva.com/8052/80567-8052023.pdf?src-supplier=Element14, ComponentLink4Description=https://datasheet.ciiva.com/712/eph-712504.pdf?src-supplier=Digi-Key, ComponentLink4URL=https://datasheet.ciiva.com/712/eph-712504.pdf?src-supplier=Digi-Key, ComponentLink5Description=https://datasheet.ciiva.com/712/eph-712505.pdf?src-supplier=Digi-Key, ComponentLink5URL=https://datasheet.ciiva.com/712/eph-712505.pdf?src-supplier=Digi-Key, ComponentLink6Description=https://datasheet.ciiva.com/712/eph-712506.pdf?src-supplier=Digi-Key, ComponentLink6URL=https://datasheet.ciiva.com/712/eph-712506.pdf?src-supplier=Digi-Key, Pitch=2mm, Supplier 1=Digi-Key
C1 C2 C3 C4 C5 C6 C7 C8 C10 C13 C16 C21 C22 C23 C24 C25 C26 C28 C30 C31 C32 C33 C34 C35 C36 C37 C38 C39: "CAP CER 0.1UF 50V X7R 0603", Manufacturer=Yageo, MPN=CC0603KRX7R9BB104, Package="0603 (1608 Metric)", Supplier Part Number 1=311-1344-1-ND, Temperature Coefficient=X7R, Voltage Rating=50V, Dimensions="0.063\" L x 0.031\" W (1.60mm x 0.80mm)", Supplier 1=Digi-Key
C9 C11: "CAP CER 10000PF 16V X7R 0603", Manufacturer=Yageo, MPN=CC0603KRX7R7BB103, Package="0603 (1608 Metric)", Supplier Part Number 1=311-3369-1-ND, Temperature Coefficient=X7R, Voltage Rating=16V, Dimensions="0.063\" L x 0.031\" W (1.60mm x 0.80mm)", Supplier 1=Digi-Key
C12: "CAP CER 1UF 16V Y5V 0603", Manufacturer=Yageo, MPN=CC0603ZRY5V7BB105, Package="0603 (1608 Metric)", Supplier Part Number 1=311-1372-1-ND, Temperature Coefficient=Y5V, Voltage Rating=16V, Dimensions="0.063\" L x 0.031\" W (1.60mm x 0.80mm)", Supplier 1=Digi-Key
C14 C15: "CAP CER 15PF 250V NPO 0603", Manufacturer=Yageo, MPN=AC0603JRNPOYBN150, Package="0603 (1608 Metric)", Supplier Part Number 1=311-3282-1-ND, Temperature Coefficient=NP0, Voltage Rating=250V, Dimensions="0.063\" L x 0.031\" W (1.60mm x 0.80mm)", Supplier 1=Digi-Key
C17 C18: "CAP CER 4.7UF 6.3V X5R 0603", Manufacturer=Yageo, MPN=CC0603KRX5R5BB475, Package="0603 (1608 Metric)", Supplier Part Number 1=311-1521-1-ND, Temperature Coefficient=X5R, Voltage Rating=6.3V, Dimensions="0.063\" L x 0.031\" W (1.60mm x 0.80mm)", Supplier 1=Digi-Key
C19 C20: library part CAP_10uF_50V_1206, "CAP CER 10UF 50V X5R 1206", Manufacturer=Murata, MPN=GRT31CR61H106KE01L, Package="1206 (3216 Metric)", Supplier Part Number 1=490-12456-1-ND, Voltage Rating=50V, Dimensions="0.126\" L x 0.063\" W (3.20mm x 1.6mm)", Supplier 1=Digi-Key
C27 C29: "CAP DNP 0603", Package="0603 (1608 Metric)", Dimensions="0.063\" L x 0.031\" W (1.60mm x 0.80mm)"
CAN1 CAN2 FSR1-1 FSR1-2 FSR2-1 FSR2-2: "HEADER 2X1"
CAN1A CAN1B CAN2A CAN2B EN_BCP EN_ELB EN_TRN M_ELB M_TRN SV_CAW: Manufacturer=JST, Manufacturer Part Number=B3B-PH-SM4-TB(LF)(SN), Max Current Rating=2A, Max Voltage Rating=100V, Supplier Part Number 1=455-1735-1-ND, ComponentLink1Description=https://datasheet.ciiva.com/11747/0900766b80ddea81-11747684.pdf?src-supplier=RSComponents, ComponentLink1URL=https://datasheet.ciiva.com/11747/0900766b80ddea81-11747684.pdf?src-supplier=RSComponents, Pitch=2mm, Supplier 1=Digi-Key
CMC1 CMC2: "Common Mode Choke", Supplier Part Number 1=DR331-513AECT-ND, LatestRevisionDate=17-Jul-2002, LatestRevisionNote="Re-released for DXP Platform.", PackageDescription="Transformer; 5 Leads", PackageReference=TRF_5, Published=8-Jun-2000, Publisher="Altium Limited", Supplier 1=Digi-Key
D1: "TVS DIODE 5V 9.2V DO214AA", Breakdown Voltage=6.4V, Case/Package=SMB, Clamping Voltage=9.2V, Leakage Current=1.6mA, Manufacturer="Nexperia USA Inc.", Manufacturer 1=Littelfuse, Manufacturer Part Number 1=SMBJ5.0CA, Max Breakdown Voltage=7V, Max Operating Temperature=150∑C, Max Power Dissipation=5W, Max Surge Current=65.3A, Min Operating Temperature=-65∑C, MPN=PESD2CAN,215, Operating Supply Voltage=5V, Package="SC-70, SOT-323", Package Quantity=3000, Peak Pulse Power=600W, Power Line Protection=No, Supplier Part Number 1=1727-3891-1-ND, Test Current=10mA, ComponentLink1Description=Datasheet, ComponentLink1URL=https://www.littelfuse.com/~/media/electronics/datasheets/tvs_diodes/littelfuse_tvs_diode_smbj_datasheet.pdf.pdf, Composition=Zener, Direction=Bidirectional, Element Configuration=Single, ESD Protection=Yes, Height=0.096inch, Lead Free="Lead Free", Length=0.179inch, Max Reverse Leakage Current=1.6mA, Min Breakdown Voltage=6.4V, Mount="Surface Mount", Number of Bidirectional Channels=1, Number of Channels=1, Number of Elements=1, Number of Pins=2, Packaging="Tape and Reel", Peak Pulse Current=65.3A, Polarity=Bidirectional, Power Dissipation=600W, Pricing 1="1=0.39000, 10=0.31300, 25=0.28640, 100=0.17980, 250=0.17784, 500=0.16650, 1000=0.11322 (USD)", Radiation Hardening=No, REACH SVHC="No SVHC", Reverse Breakdown Voltage=6.4V, Reverse Standoff Voltage=5V, Stock 1=23233, Supplier 1=Digi-Key, Termination=SMD/SMT, Voltage Rating (DC)=5V, Width=0.155inch
D2 D3 D4 D5: "TVS DIODE 24V 41V SOT323-3", Manufacturer="Nexperia USA Inc.", Manufacturer Part Number=PESD2CAN,215, Package="SC-70, SOT-323", Supplier Part Number 1=1727-3891-1-ND, ComponentLink1Description=Datasheet, ComponentLink1URL=https://assets.nexperia.com/documents/data-sheet/PESD1CAN-U.pdf, Supplier 1=Digi-Key
D6 D8 D9 D10: "LED GREEN DIFFUSED 0805 SMD", Forward Voltage Drop=2.2V, Manufacturer=OSRAM, MPN="LG R971-KN-1", Package="0805 (2012 Metric)", Supplier Part Number 1=475-1410-1-ND, Supplier 1=Digi-Key
D7: "LED YELLOW DIFFUSED 0805 SMD", Forward Voltage Drop=2.2V, Manufacturer=OSRAM, MPN="LY R976-PS-36", Package="0805 (2012 Metric)", Supplier Part Number 1=475-2560-1-ND, Supplier 1=Digi-Key
DEBUG: "Header, 4-Pin Dual row", Manufacturer="Sullins Connector Solutions", MPN=GRPB042VWVN-RC, Supplier Part Number 1=S9015E-04-ND, Supplier 1=Digi-Key
EN_CAW EN_WST1 EN_WST2: Manufacturer=JST, Manufacturer Part Number=B4B-PH-SM4-TB(LF)(SN), Max Current Rating=2A, Max Voltage Rating=100V, Supplier Part Number 1=455-1736-1-ND, ComponentLink1Description=https://datasheet.ciiva.com/8052/1699381-8052048.pdf?src-supplier=Element14, ComponentLink1URL=https://datasheet.ciiva.com/8052/1699381-8052048.pdf?src-supplier=Element14, ComponentLink2Description=https://datasheet.ciiva.com/11747/0900766b80ddea81-11747504.pdf?src-supplier=RSComponents, ComponentLink2URL=https://datasheet.ciiva.com/11747/0900766b80ddea81-11747504.pdf?src-supplier=RSComponents, ComponentLink3Description=https://datasheet.ciiva.com/6747/80567-6747409.pdf?src-supplier=Newark, ComponentLink3URL=https://datasheet.ciiva.com/6747/80567-6747409.pdf?src-supplier=Newark, ComponentLink4Description=https://datasheet.ciiva.com/727/eph-727525.pdf?src-supplier=Digi-Key, ComponentLink4URL=https://datasheet.ciiva.com/727/eph-727525.pdf?src-supplier=Digi-Key, ComponentLink5Description=https://datasheet.ciiva.com/712/eph-712582.pdf?src-supplier=Digi-Key, ComponentLink5URL=https://datasheet.ciiva.com/712/eph-712582.pdf?src-supplier=Digi-Key, ComponentLink6Description=https://datasheet.ciiva.com/712/eph-712583.pdf?src-supplier=Digi-Key, ComponentLink6URL=https://datasheet.ciiva.com/712/eph-712583.pdf?src-supplier=Digi-Key, Pitch=2mm, Supplier 1=Digi-Key
F1: "FUSE SMD 2A 32V", Current Rating=2A, Supplier Part Number 1=F7132CT-ND, Voltage Rating (AC)=32V, ComponentLink1Description=https://datasheet.ciiva.com/303/467-303400.pdf?src-supplier=Digi-Key, ComponentLink1URL=https://datasheet.ciiva.com/303/467-303400.pdf?src-supplier=Digi-Key, ComponentLink2Description=http://datasheet.octopart.com/0467002.NRHF-Littelfuse-datasheet-32023482.pdf?src-supplier=Future+Electronics, ComponentLink2URL=http://datasheet.octopart.com/0467002.NRHF-Littelfuse-datasheet-32023482.pdf?src-supplier=Future+Electronics, ComponentLink3Description=http://datasheet.octopart.com/0467002.NRHF-Littelfuse-datasheet-136509808.pdf?src-supplier=Future+Electronics, ComponentLink3URL=http://datasheet.octopart.com/0467002.NRHF-Littelfuse-datasheet-136509808.pdf?src-supplier=Future+Electronics, Mount="Surface Mount", Supplier 1=Digi-Key, Supplier Packaging 1="Cut Tape", Voltage Rating (DC)=32V
F2: "FUSE SMD 1.5A 32V", Current Rating=1.5A, Supplier Part Number 1=F5702CT-ND, Voltage Rating (AC)=32V, ComponentLink1Description=https://datasheet.ciiva.com/26890/getdatasheetpartid-721713-26890390.pdf?src-supplier=Verical, ComponentLink1URL=https://datasheet.ciiva.com/26890/getdatasheetpartid-721713-26890390.pdf?src-supplier=Verical, ComponentLink2Description=https://datasheet.ciiva.com/7464/467-7464069.pdf?src-supplier=Digi-Key, ComponentLink2URL=https://datasheet.ciiva.com/7464/467-7464069.pdf?src-supplier=Digi-Key, ComponentLink3Description=https://datasheet.ciiva.com/7464/467-7464072.pdf?src-supplier=Digi-Key, ComponentLink3URL=https://datasheet.ciiva.com/7464/467-7464072.pdf?src-supplier=Digi-Key, Mount="Surface Mount", Supplier 1=Digi-Key, Supplier Packaging 1="Cut Tape", Voltage Rating (DC)=32V
F3 F4 F5 F6 F7 F8: "FUSE SMD 250mA 32V", Current Rating=250mA, Supplier Part Number 1=F6020CT-ND, Voltage Rating (AC)=32V, ComponentLink1Description=https://datasheet.ciiva.com/303/467-303396.pdf?src-supplier=Digi-Key, ComponentLink1URL=https://datasheet.ciiva.com/303/467-303396.pdf?src-supplier=Digi-Key, ComponentLink2Description=https://datasheet.ciiva.com/18652/littelfuse-fuse-467-datasheet-pdf-18652490.pdf?src-supplier=Digi-Key, ComponentLink2URL=https://datasheet.ciiva.com/18652/littelfuse-fuse-467-datasheet-pdf-18652490.pdf?src-supplier=Digi-Key, ComponentLink3Description=https://datasheet.ciiva.com/18652/littelfuse-fuse-467-datasheet-pdf-18652491.pdf?src-supplier=Digi-Key, ComponentLink3URL=https://datasheet.ciiva.com/18652/littelfuse-fuse-467-datasheet-pdf-18652491.pdf?src-supplier=Digi-Key, ComponentLink4Description=https://datasheet.ciiva.com/18652/littelfuse-fuse-467-datasheet-pdf-18652492.pdf?src-supplier=Digi-Key, ComponentLink4URL=https://datasheet.ciiva.com/18652/littelfuse-fuse-467-datasheet-pdf-18652492.pdf?src-supplier=Digi-Key, Mount="Surface Mount", Supplier 1=Digi-Key, Supplier Packaging 1="Cut Tape", Voltage Rating (DC)=32V
H1 H2 H3 H4: "6cm x 6cm"
M_CB M_WST SPI_1 SPI_2 SPI_4: Manufacturer=JST, Manufacturer Part Number=B5B-PH-SM4-TB(LF)(SN), Max Current Rating=2A, Max Voltage Rating=100V, Supplier Part Number 1=455-1737-1-ND, ComponentLink1Description=https://datasheet.ciiva.com/11749/0900766b80ddea81-11749188.pdf?src-supplier=RSComponents, ComponentLink1URL=https://datasheet.ciiva.com/11749/0900766b80ddea81-11749188.pdf?src-supplier=RSComponents, ComponentLink2Description=https://datasheet.ciiva.com/712/eph-712595.pdf?src-supplier=Digi-Key, ComponentLink2URL=https://datasheet.ciiva.com/712/eph-712595.pdf?src-supplier=Digi-Key, ComponentLink3Description=https://datasheet.ciiva.com/712/eph-712596.pdf?src-supplier=Digi-Key, ComponentLink3URL=https://datasheet.ciiva.com/712/eph-712596.pdf?src-supplier=Digi-Key, ComponentLink4Description=https://datasheet.ciiva.com/730/eph-730612.pdf?src-supplier=Digi-Key, ComponentLink4URL=https://datasheet.ciiva.com/730/eph-730612.pdf?src-supplier=Digi-Key, ComponentLink5Description=https://datasheet.ciiva.com/16344/eph-16344920.pdf?src-supplier=Future+Electronics, ComponentLink5URL=https://datasheet.ciiva.com/16344/eph-16344920.pdf?src-supplier=Future+Electronics, Pitch=2mm, Supplier 1=Digi-Key
Q1: "MOSFET N-CH 20V 6A SOT23", Manufacturer="Alpha & Omega", MPN=AO3420, Package="TO-236-3, SC-59, SOT-23-3", Supplier Part Number 1=785-1014-1-ND, ComponentLink1Description=Datasheet, ComponentLink1URL=http://aosmd.com/res/data_sheets/AO3420.pdf, Supplier 1=Digi-Key
R1 R4: "RES SMD 120 OHM 5% 1/10W 0603", Manufacturer=Yageo, MPN=RC0603JR-07120RL, Package="0603 (1608 Metric)", Supplier Part Number 1=311-120GRCT-ND, Tolerance=5%, Dimensions="0.063\" L x 0.031\" W (1.60mm x 0.80mm)", Supplier 1=Digi-Key
R2 R3 R5 R6: "RES SMD 0 OHM JUMPER 1/10W 0603", Manufacturer=Yageo, MPN=RC0603JR-070RL, Package="0603 (1608 Metric)", Supplier Part Number 1=311-0.0GRCT-ND, Dimensions="0.063\" L x 0.031\" W (1.60mm x 0.80mm)", Supplier 1=Digi-Key
R7 R8 R9 R10 R11 R12 R13 R14 R15 R16 R17 R18 R19 R20 R21 R22 R23 R24 R28 R30 R32 R33 R34: "RES SMD 10K OHM 5% 1/10W 0603", Manufacturer=Yageo, MPN=RC0603JR-0710KL, Package="0603 (1608 Metric)", Supplier Part Number 1=311-10KGRCT-ND, Tolerance=5%, Dimensions="0.063\" L x 0.031\" W (1.60mm x 0.80mm)", Supplier 1=Digi-Key
R25 R26 R27 R29 R31: "RES SMD 100 OHM 1% 1/10W 0603", Manufacturer=Yageo, MPN=RC0603FR-07100RL, Package="0603 (1608 Metric)", Supplier Part Number 1=311-100HRCT-ND, Tolerance=1%, Dimensions="0.063\" L x 0.031\" W (1.60mm x 0.80mm)", Supplier 1=Digi-Key
R35 R42: "RES SMD 825K OHM 1% 1/10W 0603", Manufacturer=Yageo, MPN=RC0603FR-07825KL, Package="0603 (1608 Metric)", Supplier Part Number 1=311-825KHRCT-ND, Tolerance=1%, Dimensions="0.063\" L x 0.031\" W (1.60mm x 0.80mm)", Supplier 1=Digi-Key
R36: library part RES_1K1_0603, "RES SMD 1.1K OHM 1% 1/10W 0603", Manufacturer=Yageo, MPN=RC0603FR-071K1L, Package="0603 (1608 Metric)", Supplier Part Number 1=311-1.10KHRCT-ND, Tolerance=1%, Dimensions="0.063\" L x 0.031\" W (1.60mm x 0.80mm)", Supplier 1=Digi-Key
R37 R39: "RES SMD 165K OHM 1% 1/10W 0603", Manufacturer=Yageo, MPN=RC0603FR-07165KL, Package="0603 (1608 Metric)", Supplier Part Number 1=311-165KHRCT-ND, Tolerance=1%, Dimensions="0.063\" L x 0.031\" W (1.60mm x 0.80mm)", Supplier 1=Digi-Key
R38 R43: "RES DNP 0603", Package="0603 (1608 Metric)", Dimensions="0.063\" L x 0.031\" W (1.60mm x 0.80mm)"
R40 R48 R49 R50 R54 R55 R56 R60 R61 R62: "RES SMD 2.2K OHM 1% 1/10W 0603", Manufacturer=Yageo, MPN=RC0603FR-072K2L, Package="0603 (1608 Metric)", Supplier Part Number 1=311-2.20KHRCT-ND, Tolerance=1%, Dimensions="0.063\" L x 0.031\" W (1.60mm x 0.80mm)", Supplier 1=Digi-Key
R41: library part RES_14K3_0603, "RES SMD 14.3K OHM 1% 1/10W 0603", Manufacturer=Yageo, MPN=RC0603FR-0714K3L, Package="0603 (1608 Metric)", Supplier Part Number 1=311-14.3KHRCT-ND, Tolerance=1%, Dimensions="0.063\" L x 0.031\" W (1.60mm x 0.80mm)", Supplier 1=Digi-Key
R44: "RES SMD 1K OHM 5% 1/10W 0603", Manufacturer=Yageo, MPN=RC0603JR-071KL, Package="0603 (1608 Metric)", Supplier Part Number 1=311-1.0KGRCT-ND, Tolerance=5%, Dimensions="0.063\" L x 0.031\" W (1.60mm x 0.80mm)", Supplier 1=Digi-Key
R45 R46 R47 R51 R52 R53 R57 R58 R59: "RES SMD 3.3K OHM 5% 1/10W 0603", Digikey Part Number=311-3.3KGRCT-ND, Manufacturer=Yageo, MPN=RC0603JR-073K3L, Package="0603 (1608 Metric)", Tolerance=5%, Dimensions="0.063\" L x 0.031\" W (1.60mm x 0.80mm)", Supplier 1=Digi-Key, Supplier Part Number 1=311-3.3KGRCT-ND
S1: "Power Switch (Red)", Manufacturer=C&K, MPN="PTS830GM140 SMTR LFS", Supplier Part Number 1=CKN10587CT-ND, ComponentLink1Description=Datasheet, ComponentLink1URL=https://www.ckswitches.com/media/1478/pts830.pdf, Supplier 1=Digi-Key
S2 S3: "Tactile Switch (Grey)", Manufacturer="Omron Electronics Inc-EMC Div", MPN=B3U-1100P, Supplier Part Number 1=SW1021TR-ND, Supplier 1=Digi-Key
U1 U2: library part LTC2875, "IC TXRX CAN 4MBPS 8SO", Manufacturer="Linear Technologies", MPN=LTC2875IS8#PBF, Package="8-SOIC (0.154\", 3.90mm Width)", Supplier Part Number 1=LTC2875IS8#PBF-ND, ComponentLink1Description=Datasheet, ComponentLink1URL=https://www.analog.com/media/en/technical-documentation/data-sheets/2875f.pdf, Supplier 1=Digi-Key
U3: library part CMP-0243-00221-1, "ARM Cortex-M4 32-bit MCU+FPU, 512 KB Flash, 128 KB Internal RAM, 81 I/Os, 100-Pin LQFP, -40 to 105 degC, Tray", I/Os (High Current)=81, Operating Frequency(F) (Processor speed) (MHz)=180, Package Description=LQFP100, Package Reference="100-Pin Low Profile Quad Flat Package, Body 14 x 14 mm, Pitch 0.5 mm", Supply Voltage(Vcc) min (V)=1.7, ComponentLink1Description="Manufacturer URL", ComponentLink1URL=http://www.st.com/, ComponentLink2Description=Datasheet, ComponentLink2URL=http://www.st.com/st-web-ui/static/active/en/resource/technical/document/datasheet/DM00141306.pdf, Core="ARM Cortex-M4", D/A Converter=2, DatasheetVersion="Rev. 6", FLASH Size (Prog) (kB)=512, Internal RAM Size (kB)=128, Mounting Technology="Surface Mount", Packing=Tray
U4 U5 U6: library part CMP-0859-00013-4, "Dual-Bit Dual Supply Transceiver with Configurable Voltage Translation and 3-State Outputs, DCU0008A, LARGE T&R", F @ Nom Voltage(Max)(Mhz)=150, Generic Part Number=SN74LVC2T45, ICC @ Nom Voltage(Max)(mA)=0.004, Manufacturer="Texas Instruments", Operating Temperature Range(C)="-40 to 85", Rating=Military, tpd @ Nom Voltage(Max)(ns)=17.7,10.3,8.3,7.2, Voltage(Nom)(V)=1.8,2.5,3.3,5, 3-State Output=Yes, Bits(#)=2, DatasheetVersion=SCES516J, Input Type=CMOS/TTL, Logic=True, Output Drive (IOL/IOH)(Max)(mA)=32/-32, Output Type=CMOS, PackageReference=DCU0008A, Schmitt Trigger=No, Sub-Family="Dual Supply Translator", Technology Family=LVC, VCC(Max)(V)=5.5, VCC(Min)(V)=1.65
U7: library part OPAMP, "IC OPAMP GP 1 CIRCUIT SOT23-5", Manufacturer="Texas Instruments", Rating=Catalog, Supplier Part Number 1=296-35607-1-ND, Total Supply Voltage(Max)(+5V is 5, +/-5V is 10)=5.5, Total Supply Voltage(Min)(+5V is 5, +/-5V is 10)=1.8, CMRR(Min)(dB)=70, Code_JEDEC=MO-178, ComponentLink1Description="Manufacturer URL", ComponentLink1URL=http://www.ti.com/, ComponentLink2Description=Datasheet, ComponentLink2URL=http://www.ti.com/lit/ds/symlink/opa313.pdf, ComponentLink3Description="Package Specification", ComponentLink3URL=http://www.ti.com/litv/pdf/mpds018i, DatasheetVersion=SBOS649C, Eco-Plan="Green (RoHS & no Sb/Br)", GBW(Typ)(MHz)=1, Iq per channel(Max)(mA)=0.06, Mounting Technology="Surface Mount", Number of Channels=1, Offset Drift(Typ)(uV/C)=2, PackageDescription="5-Pin Plastic Small Outline, Body 1.6 x 2.9 mm, Pitch 0.95 mm", PackageReference=DBV0005A, PackageVersion="4073253-4/K, 03/2006", Packing="LARGE T&R", PartNumber=OPA313IDBVR, Slew Rate(Typ)(V/us)=0.5, SubFamily="Low Input Bias Current Amp (<=10pA), Low Power Amp (<=500uA)", Supplier 1=Digi-Key, Vio (25C)(Max)(mV)=2.5
U8: "IC OPAMP GP 1 CIRCUIT 8SOIC", Manufacturer="Renesas Electronics America Inc.", Supplier Part Number 1=CA3140AMZ-ND, MPN=CA3140AMZ, Supplier 1=Digi-Key
VR1: "IC REG LINEAR 3.3V 1A DPAK", Current Output=1A, Manufacturer="ON Semiconductor", MPN=NCP1117DT33T5G, Supplier Part Number 1=NCP1117DT33T5GOSCT-ND, Supplier 1=Digi-Key
Y1: "CRYSTAL 32MHZ 8PF SMD", Manufacturer="Kyocera International Inc. Electronic Components", MPN=CX2520DB32000D0GPSC1, Package="4-SMD, No Lead", Supplier Part Number 1=1253-1730-1-ND, ComponentLink1Description=Datasheet, ComponentLink1URL=https://media.digikey.com/pdf/Data%20Sheets/AVX%20PDFs/CX2520DB_USY1M-H1-16428-00_Spec.pdf, Dimensions="0.098\" L x 0.079\" W (2.50mm x 2.00mm)", Supplier 1=Digi-Key

## Nets (pads, with @x,y where several pads share a name; then routed paths per layer and width w, separated by ;. In a path a pad name is that pad's centre, name@x,y a point inside that pad or via, vN(x,y) a via of type N, cw(c..) or ccw(c..) an arc to the next point about the centre after c; other vN are vias at no path point)
3V3: C21.2 C23.2 C25.2 R32.1 R33.1 R34.1 U4.8 U5.8 U6.8
5V: C22.2 C24.2 C26.2 C28.2 C30.2 SPI_1.5 SPI_2.5 SPI_4.5 U4.1 U5.1 U6.1
+3V3: +3V3.1 C1.2 C2.2 C3.1 C4.1 C5.1 C6.1 C7.1 C8.1 C9.2 C10.2 C11.1 C12.2 C13.1 C20.1 DEBUG.1 Q1.1 R13.2 R14.2 R15.2 R16.2 R17.2 R19.2 R20.2 R21.2 R22.2 R23.2 R24.2 R25.2 R28.2 R30.2 U1.3 U2.3 U3.6 U3.11 U3.19 U3.21 U3.22 U3.28 U3.50 U3.75 U3.100 VR1.2
+5V0: +5V0.1 C19.1 F1.2 F2.2 F3.2 F4.2 F5.2 F6.2 F7.2 F8.2 FSR.1 R18.2 R36.2 U7.5 U8.7 VR1.3
\R\S\T\: C16.2 DEBUG.8 S1.4 U3.14
BUTTON_1: R28.1 S2.1 U3.2
BUTTON_2: R30.1 S3.1 U3.7
CAN1_N: CAN1A.2 CAN1B.2 CAN1L.1 CMC1.3 D2.1 D4.1 R1.1 R3.2
CAN1_P: CAN1.1 CAN1A.1 CAN1B.1 CAN1H.1 CMC1.4 D2.2 D4.2 R2.2
CAN1RX: U1.4 U3.70
CAN1TX: U1.1 U3.71
CAN2_N: CAN2A.2 CAN2B.2 CAN2L.1 CMC2.3 D3.1 D5.1 R4.1 R6.2
CAN2_P: CAN2.1 CAN2A.1 CAN2B.1 CAN2H.1 CMC2.4 D3.2 D5.2 R5.2
CAN2RX: U2.4 U3.51
CAN2TX: U2.1 U3.52
DIR_BCP: M_CB.3 U3.56
DIR_CAW: M_CB.1 U3.55
DIR_ELB: M_ELB.3 U3.58
DIR_TRN: M_TRN.3 U3.57
DIR_W1: M_WST.1 U3.97
DIR_W2: M_WST.3 U3.98
EN_CAWA: C31.2 R45.1 R48.2 U3.40
EN_CAWB: C33.2 R47.1 R49.2 U3.42
EN_W1A: C34.2 R51.1 R54.2 U3.23
EN_W1B: C36.2 R53.1 R55.2 U3.24
EN_W2A: C37.2 R57.1 R60.2 U3.90
EN_W2B: C39.2 R59.1 R61.2 U3.64
FSR_2: FSR1-1.1 FSR2-1.1 FSR.2
FSR_OUT: C27.2 C29.2 FSR_OUT.1 R38.2 R43.2 U3.16
GND: +5V.2 C1.1 C2.1 C3.2 C4.2 C5.2 C6.2 C7.2 C8.2 C9.1 C10.1 C11.2 C12.1 C13.2 C14.1 C15.1 C16.1 C17.1 C18.1 C19.2 C20.2 C21.1 C22.1 C23.1 C24.1 C25.1 C26.1 C27.1 C28.1 C29.1 C30.1 C31.1 C32.1 C33.1 C34.1 C35.1 C36.1 C37.1 C38.1 C39.1 CAN1A.3 CAN1B.3 CAN2A.3 CAN2B.3 D1.2 D2.3 D3.3 D4.3 D5.3 D6.2 D7.2 D8.2 D9.2 D10.2 DEBUG.5 EN_BCP.3 EN_CAW.4 EN_ELB.3 EN_TRN.3 EN_WST1.4 EN_WST2.4 GND.1 GND_CAN.1 GND_FSR.1 LIM_BCP1.2 LIM_BCP2.2 LIM_CAW.2 LIM_ELB1.2 LIM_ELB2.2 LIM_TRN1.2 LIM_TRN2.2 LIM_WST1.2 LIM_WST2.2 LIM_WST3.2 M_CB.5 M_ELB.1 M_TRN.1 M_WST.5 R7.1 R8.1 R9.1 R10.1 R11.1 R12.1 R40.1 R41.1 R42.1 R44.1 R48.1 R49.1 R50.1 R54.1 R55.1 R56.1 R60.1 R61.1 R62.1 S1.1 S2.2 S3.2 SPI_1.1 SPI_2.1 SPI_4.1 SV_CAW.3 U1.2 U1.8 U2.2 U2.8 U3.10 U3.20 U3.27 U3.37 U3.49 U3.74 U3.94 U3.99 U4.4 U5.4 U6.4 U7.2 U8.4 VR1.1 Y1.2
LED_1: R26.1 U3.8
LED_2: R27.1 U3.9
LED_3: R29.1 U3.34
LED_4: R31.1 U3.46
LIM_BCP1: LIM_BCP1.1 R17.1
LIM_BCP2: LIM_BCP2.1 R19.1
LIM_CAW: LIM_CAW.1 R24.1 U3.80
LIM_ELB1: LIM_ELB1.1 R13.1 U3.81
LIM_ELB2: LIM_ELB2.1 R14.1 U3.88
LIM_TRN1: LIM_TRN1.1 R15.1 U3.83
LIM_TRN2: LIM_TRN2.1 R16.1 U3.84
LIM_WR1: LIM_WST1.1 R21.1 U3.85
LIM_WR2: LIM_WST2.1 R22.1 U3.86
LIM_WR3: LIM_WST3.1 R23.1 U3.87
Net+5V_1: +5V.1 D1.1 F1.1
NetC14_2: C14.2 U3.12 Y1.1
NetC15_2: C15.2 U3.13 Y1.3
NetC17_2: C17.2 U3.73
NetC18_2: C18.2 U3.48
NetCAN1_2: CAN1.2 R1.2
NetCAN2_2: CAN2.2 R4.2
NetCMC1_1: CMC1.1 R2.1 U1.7
NetCMC1_2: CMC1.2 R3.1 U1.6
NetCMC2_1: CMC2.1 R5.1 U2.7
NetCMC2_2: CMC2.2 R6.1 U2.6
NetD6_1: D6.1 R25.1
NetD7_1: D7.1 R26.2
NetD8_1: D8.1 R27.2
NetD9_1: D9.1 R29.2
NetD10_1: D10.1 R31.2
NetEN_BCP_1: EN_BCP.1 F4.1
NetEN_BCP_2: EN_BCP.2 R46.2
NetEN_CAW_1: EN_CAW.1 R45.2
NetEN_CAW_2: EN_CAW.2 R47.2
NetEN_CAW_3: EN_CAW.3 F3.1
NetEN_ELB_1: EN_ELB.1 F6.1
NetEN_ELB_2: EN_ELB.2 R52.2
NetEN_TRN_1: EN_TRN.1 F8.1
NetEN_TRN_2: EN_TRN.2 R58.2
NetEN_WST1_1: EN_WST1.1 R51.2
NetEN_WST1_2: EN_WST1.2 R53.2
NetEN_WST1_3: EN_WST1.3 F5.1
NetEN_WST2_1: EN_WST2.1 R57.2
NetEN_WST2_2: EN_WST2.2 R59.2
NetEN_WST2_3: EN_WST2.3 F7.1
NetF2_1: F2.1 SV_CAW.2
NetFSR1-1_2: FSR1-1.2 FSR_Va.1 R37.1 R40.2
NetFSR1-2_1: FSR1-2.1 R35.2 U7.1
NetFSR1-2_2: FSR1-2.2 R38.1
NetFSR2-1_2: FSR2-1.2 FSR_BUFF.1 R44.2 U8.3
NetFSR2-2_1: FSR2-2.1 U8.6
NetFSR2-2_2: FSR2-2.2 R43.1
NetFSR_Vb_1: FSR_Vb.1 R36.1 R39.1 R41.2
NetR32_2: R32.2 U4.5
NetR33_2: R33.2 U5.5
NetR34_2: R34.2 U6.5
NetR35_1: R35.1 R37.2 U7.4
NetR39_2: R39.2 R42.2 U7.3
NetSPI_1_3: SPI_1.3 U5.3
NetSPI_1_4: SPI_1.4 U5.2
NetSPI_2_3: SPI_2.3 U4.3
NetSPI_2_4: SPI_2.4 U4.2
NetSPI_4_3: SPI_4.3 U6.3
NetSPI_4_4: SPI_4.4 U6.2
PWM_BCPEN: C32.2 R46.1 R50.2 U3.63
PWM_BCPM: M_CB.4 R9.2 U3.60
PWM_CAWM: M_CB.2 R8.2 U3.59
PWM_CSV: Q1.2 R20.1 U3.32
PWM_CSV_5V: Q1.3 R18.1 SV_CAW.1
PWM_ELBEN: C35.2 R52.1 R56.2 U3.4
PWM_ELBM: M_ELB.2 R10.2 U3.62
PWM_TRNEN: C38.2 R58.1 R62.2 U3.53
PWM_TRNM: M_TRN.2 R7.2 U3.61
PWM_W1M: M_WST.2 R11.2 U3.95
PWM_W2M: M_WST.4 R12.2 U3.96
SPI1_MISO: SPI1_MISO.1 SPI_1.2 U3.31
SPI1_MOSI: SPI1_MOSI.1 U3.91 U5.7
SPI1_SCK: SPI1_SCK.1 U3.89 U5.6
SPI2_MISO: SPI2_MISO.1 SPI_2.2 U3.17
SPI2_MOSI: SPI2_MOSI.1 U3.18 U4.7
SPI2_SCK: SPI2_SCK.1 U3.47 U4.6
SPI4_MISO: SPI4_MISO.1 SPI_4.2 U3.44
SPI4_MOSI: SPI4_MOSI.1 U3.5 U6.7
SPI4_SCK: SPI4_SCK.1 U3.1 U6.6
SWD_CLK: DEBUG.7 U3.76
SWD_IO: DEBUG.6 U3.72
UART_RTS: DEBUG.4 U3.65
UART_RX: DEBUG.3 U3.38 UART_RX.1
UART_TX: DEBUG.2 U3.39 UART_TX.1
pads on no net: +5V.3 +5V.4 CAN1A.4 CAN1A.5 CAN1B.4 CAN1B.5 CAN2A.4 CAN2A.5 CAN2B.4 CAN2B.5 EN_BCP.4 EN_BCP.5 EN_CAW.5 EN_CAW.6 EN_ELB.4 EN_ELB.5 EN_TRN.4 EN_TRN.5 EN_WST1.5 EN_WST1.6 EN_WST2.5 EN_WST2.6 FSR.3 FSR.4 H1.0 H2.0 H3.0 H4.0 LIM_BCP1.3 LIM_BCP1.4 LIM_BCP2.3 LIM_BCP2.4 LIM_CAW.3 LIM_CAW.4 LIM_ELB1.3 LIM_ELB1.4 LIM_ELB2.3 LIM_ELB2.4 LIM_TRN1.3 LIM_TRN1.4 LIM_TRN2.3 LIM_TRN2.4 LIM_WST1.3 LIM_WST1.4 LIM_WST2.3 LIM_WST2.4 LIM_WST3.3 LIM_WST3.4 M_CB.6 M_CB.7 M_ELB.4 M_ELB.5 M_TRN.4 M_TRN.5 M_WST.6 M_WST.7 S1.2 S1.3 SPI_1.6 SPI_1.7 SPI_2.6 SPI_2.7 SPI_4.6 SPI_4.7 SV_CAW.4 SV_CAW.5 U1.5 U2.5 U3.3 U3.15 U3.25 U3.26 U3.29 U3.30 U3.33 U3.35 U3.36 U3.41 U3.43 U3.45 U3.54 U3.66 U3.67 U3.68 U3.69 U3.77 U3.78 U3.79 U3.82 U3.92 U3.93 U8.1 U8.2 U8.5 U8.8 Y1.4

## Polygon pours and split planes (outlines as drawn)
no net on Ground (split plane): 3934.22,1937.44 3934.27,1936.93 3933.94,1932.71 3932.83,1928.09 3931.01,1923.7 3928.53,1919.66 3925.45,1916.05 3922.26,1913.33 3922.28,1913.3 3907.47,1902.17 3857.21,1863.45 3807.44,1824.11 3758.15,1784.16 3750.51,1777.82 3750.54,1777.78 3750.53,1777.78 3749.9,1778.55 3749.34,1778.32 3750.12,1777.43 3746.49,1774.46 3738.38,1766.86 3730.78,1758.75 3723.73,1750.16 3717.26,1741.13 3711.39,1731.69 3706.15,1721.89 3701.57,1711.77 3697.65,1701.37 3694.43,1690.73 3691.9,1679.91 3690.09,1668.94 3689,1657.88 3688.64,1646.87 3688.63,1646.78 3688.63,1078.14 3688.68,1077.63 3688.35,1073.41 3687.24,1068.79 3685.43,1064.4 3682.95,1060.36 3679.86,1056.75 3676.25,1053.66 3672.2,1051.18 3667.82,1049.36 3663.2,1048.26 3658.97,1047.92 3658.47,1047.97 3107.21,1047.97 3107.12,1047.96 3096.1,1047.6 3085.04,1046.51 3074.08,1044.7 3063.26,1042.18 3052.62,1038.95 3042.22,1035.04 3032.1,1030.45 3022.3,1025.22 3012.86,1019.35 3003.83,1012.87 2995.24,1005.82 2987.13,998.23 2979.53,990.12 2973.75,983.08 2973.78,983.06 2973.77,983.05 2973.1,983.58 2972.87,983.05 2973.43,982.63 2973.36,982.55 2972.79,981.86 2972.79,981.85 2972.75,981.77 2962.24,968.47 2923.51,918.22 2885.41,867.5 2847.93,816.31 2811.08,764.66 2774.87,712.57 2739.3,660.04 2704.38,607.07 2670.11,553.68 2636.49,499.87 2603.54,445.66 2579.12,404.33 15.33,404.33 15.33,4541.82 3934.22,4541.82